# Allegro board PoFA1-10.brd
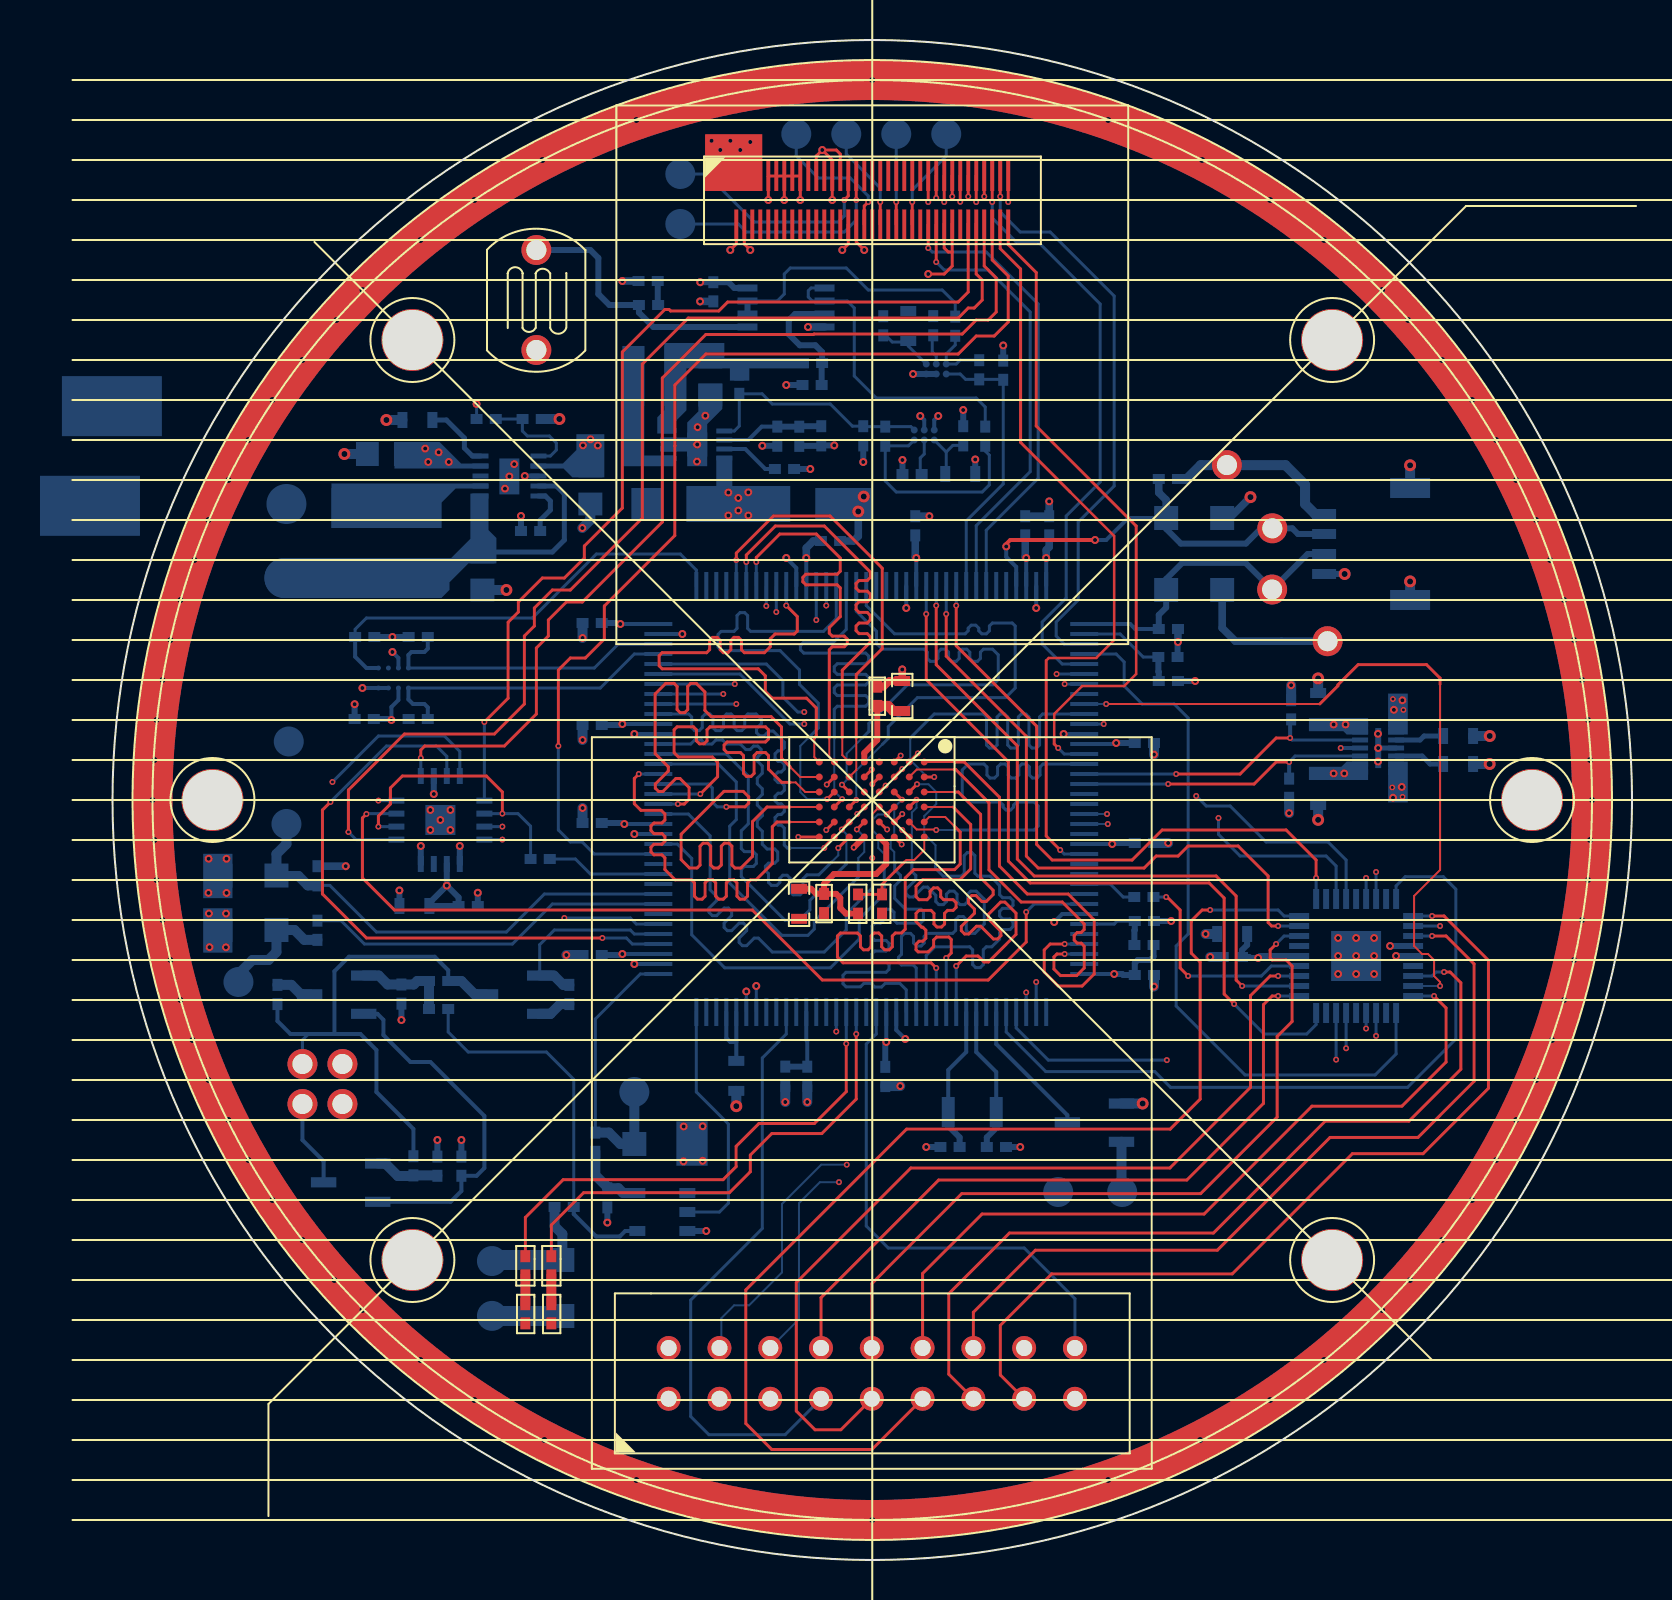
[diagram p0: board, top side]
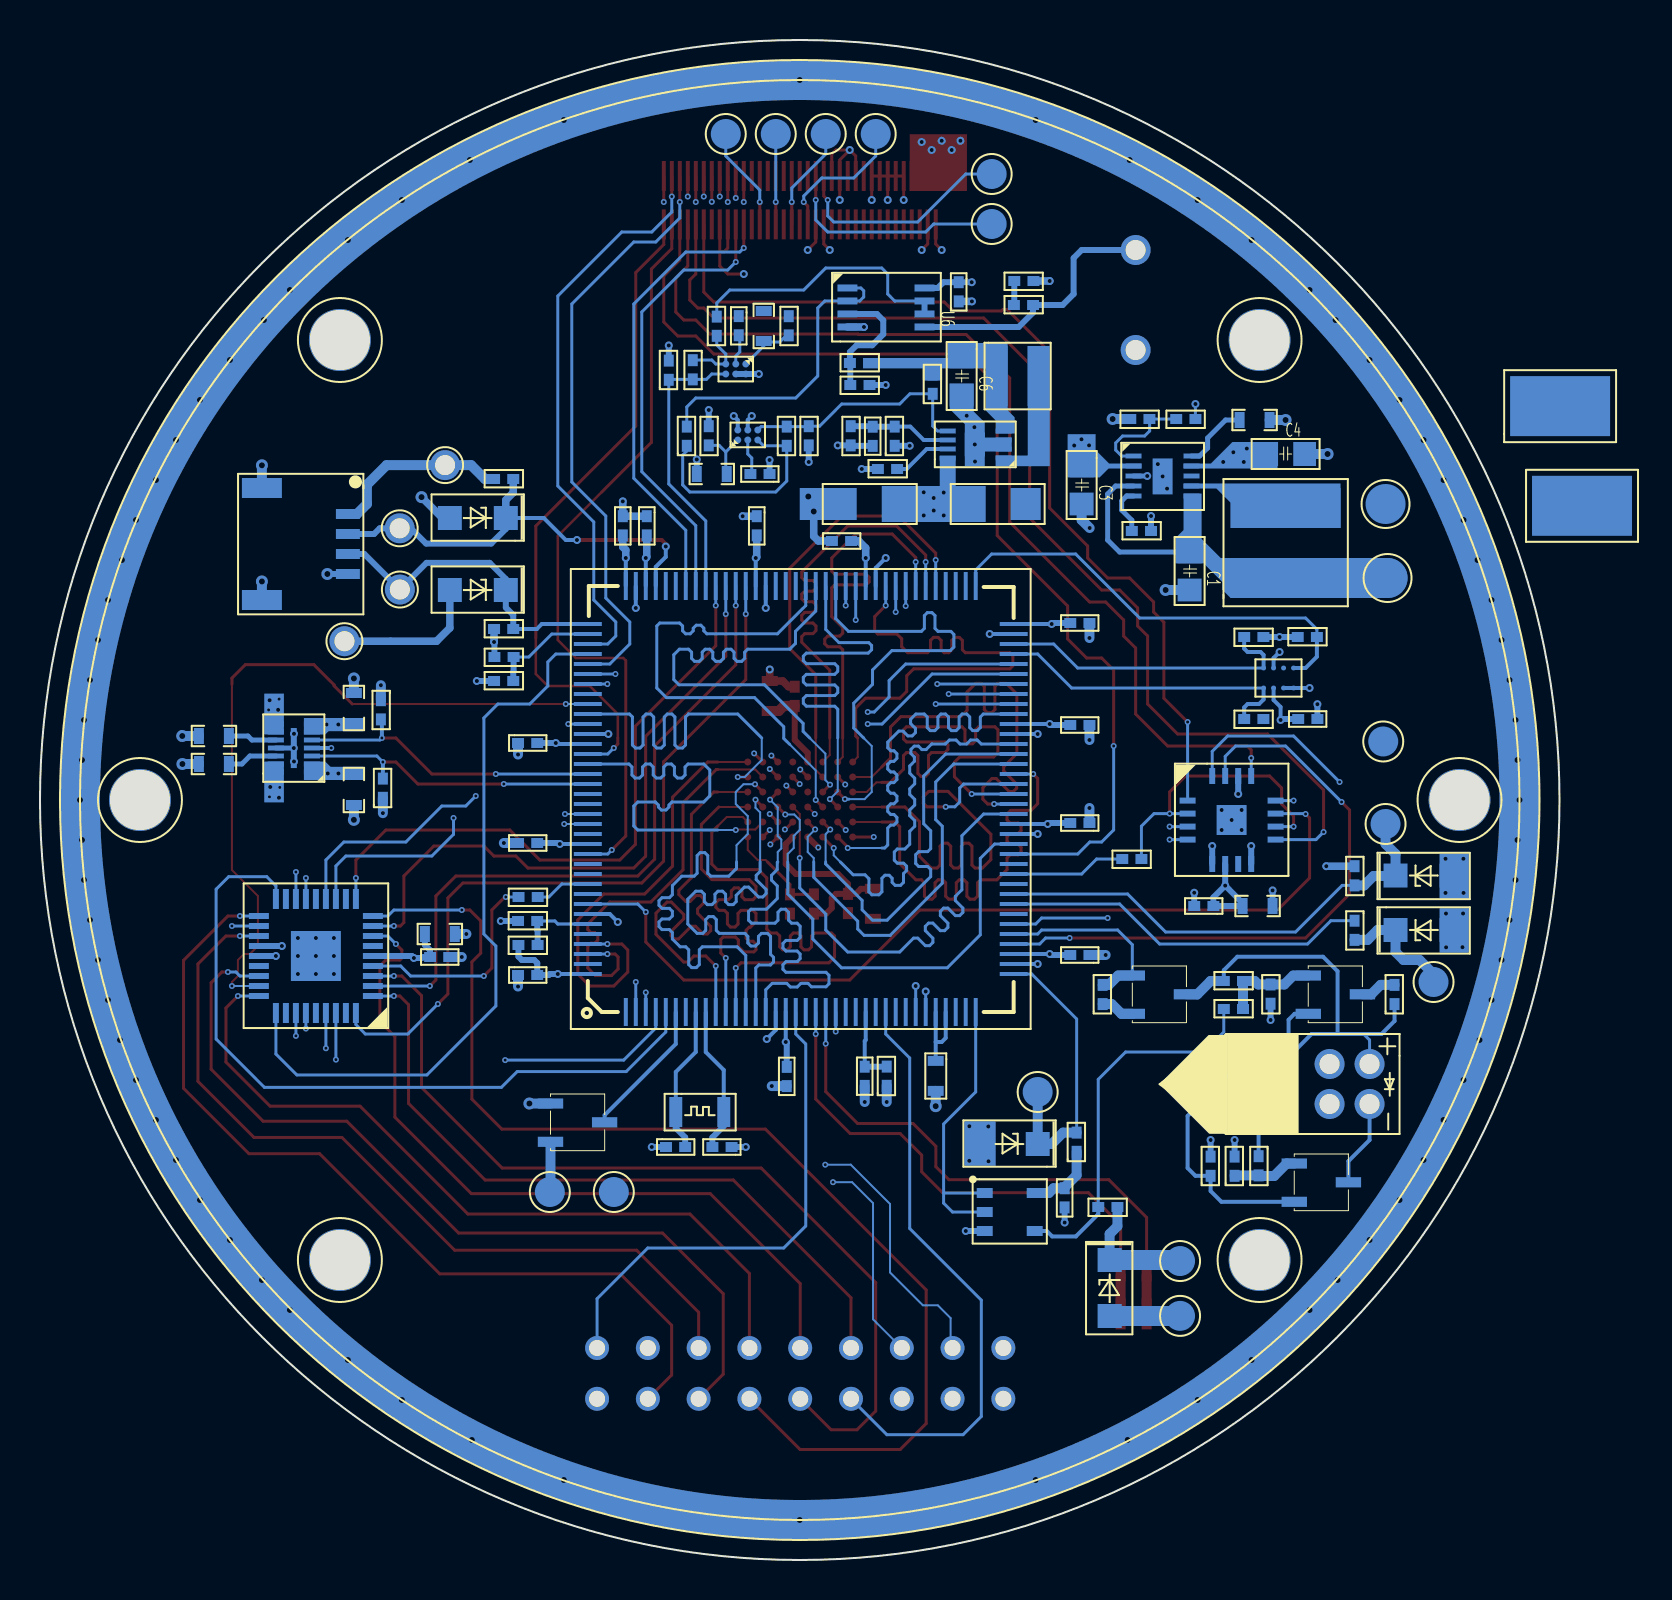
[diagram p1: board, bottom side, seen from below]

Outline 76 x 76 mm; copper layers: TOP, GND, VCC, BOTTOM. Coordinates in mm from the lower left corner of the outline.
Outline path: circle c38,38 r38

## Design rules (mm)
constraint set DEFAULT: min track width 0.15
net group BUS_SWITCH: nets BUS_SWITCH N57182
net group N00115: nets N00115 N00127
net group SYNC_SWITCH: nets N94378 SYNC_SWITCH
net group UART3_TX: nets N169854 UART3_TX
net group VPHOTO: nets N83192 VPHOTO
net group CAM1_SIGNAL: nets CAM1_D0 CAM1_D1 CAM1_D2 CAM1_D3 CAM1_D4 CAM1_D5 CAM1_D6 CAM1_D7 CAM1_HSYNC CAM1_PCLK CAM1_VSYNC
net group DAY_NIGHT: nets DAY_NIGHT N16602 N16606
net group DCMI: nets DCMI_D0 DCMI_D1 DCMI_D2 DCMI_D3 DCMI_D4 DCMI_D5 DCMI_D6 DCMI_D7 DCMI_D8 DCMI_D9 DCMI_D10 DCMI_D11 DCMI_D12 DCMI_D13 DCMI_HSYNC DCMI_PIXCLK DCMI_VSYNC
net group LDO22: nets LDO22 N00530 N02509 N04876 N06131 N06552 N13003 UNDER_VOLTAGE VCAP
net group MG1_DATA_BUS: nets FMC_D0 FMC_D1 FMC_D2 FMC_D3 FMC_D4 FMC_D5 FMC_D6 FMC_D7 FMC_D8 FMC_D9 FMC_D10 FMC_D11 FMC_D12 FMC_D13 FMC_D14 FMC_D15 FMC_NBL0 FMC_NBL1 FMC_NE1 FMC_NOE FMC_NWE
net group MG2_ADDR_BUS: nets FMC_A0 FMC_A1 FMC_A2 FMC_A3 FMC_A4 FMC_A5 FMC_A6 FMC_A7 FMC_A8 FMC_A9 FMC_A10 FMC_A11 FMC_A12 FMC_A13 FMC_A14 FMC_A15 FMC_A16 FMC_A17 FMC_A18 FMC_A19 FMC_A20
net group N112361: nets N66919 N67019 N67360 N69262 N70908 N112361

## Placement (name value [footprint] x y rotation side)
C1  10uF  [C0805]  19.1 50.5 270 bottom
C2  1uF  [C0603]  16.05 56.6 180 bottom
C3  10uF  [C0805]  24.5 54.8 270 bottom
C4  10uF  [C0805]  14.75 54.7 180 bottom
C6  10uF  [C0805]  30.5 60.25 270 bottom
C7  33pF  [C0402]  34.1 55.7 90 bottom
C8  22uF  [C1206]  29.7 52 180 bottom
C9  22uF  [C1206]  32.9 53.6 0 bottom
C10  0.1uF  [C0402]  30.3 63.9 270 bottom
C11  2.2uF  [C0603]  43.2 53.9 180 bottom
C12  0.1uF  [C0402]  39.5 54.55 0 bottom
C13  1uF  [C0603]  60.7 43.4 270 bottom
C14  1uF  [C0603]  59.9 37.7 90 bottom
C15  1uF  [C0603]  66.5 40.2 0 bottom
C16  1uF  [C0603]  66.5 41.6 0 bottom
C17  2.2uF  [C0603]  40.2 62.5 270 bottom
C18  0.1uF  [C0402]  41.3 62.2 270 bottom
C19  10uF  [C0603]  39.9 42.4 90 top
C20  0.1uF  [C0402]  38.5 42.7 90 top
C21  0.1uF  [C0402]  35.34 33.31 270 top
C22  10uF  [C0603]  33.94 33.61 270 top
C23  0.1uF  [C0402]  56.5 29.9 180 bottom
C24  10uF  [C0603]  56.8 30.9 180 bottom
C25  0.1uF  [C0402]  25 18.6 270 bottom
C26  0.1uF  [C0402]  17.3 32.95 0 bottom
C27  10uF  [C0603]  15.9 32.3 180 bottom
C28  0.1uF  [C0402]  38.4 23.69 90 bottom
C29  0.1uF  [C0402]  52.1 29 180 bottom
C30  0.1uF  [C0402]  52.1 35.6 180 bottom
C31  0.1uF  [C0402]  52.1 40.6 180 bottom
C32  0.1uF  [C0402]  23.5 30.5 0 bottom
C33  0.1uF  [C0402]  23.5 37.1 0 bottom
C34  0.1uF  [C0402]  23.5 42 0 bottom
C35  0.1uF  [C0402]  23.5 47.1 0 bottom
C36  0.1uF  [C0402]  36.4 50.7 180 bottom
C37  0.1uF  [C0402]  40.4 52.2 270 bottom
C38  0.1uF  [C0402]  47.1 52.2 270 bottom
C39  0.1uF  [C0402]  45.9 52.2 270 bottom
C40  0.1uF  [C0402]  34.5 23.7 90 bottom
C41  12pF  [C0402]  41.4 20.9 0 bottom
C42  12pF  [C0402]  44.7 20.4 180 bottom
C43  0.1uF  [C0402]  12.1 42.3 0 bottom
D1  LED  [LED0402]  21.7 15.2 270 top
D2  LED  [LED0402]  20.4 15.2 270 top
D3  PTVS3V3S1UTR  [SOD123W]  26.1 20.8 0 bottom
D4  PTVS3V3S1UTR  [SOD123W]  22.5 15 270 bottom
D5  PTVS3V3S1UTR  [SOD123W]  8.2 31.5 180 bottom
D6  PTVS3V3S1UTR  [SOD123W]  8.2 34.22 180 bottom
D7  PTVS3V3S1UTR  [SOD123W]  52.7 52.1 0 bottom
D8  PTVS3V3S1UTR  [SOD123W]  52.7 48.5 0 bottom
J1  Header2x9-2.54mm  [HEADER2X9-2D54]  27.82 10.6 0 top
J2  DF40HC(3.0)-70DS-0.4V(51)  [DF40HC-70DS]  31.2 69.2 0 top
J3  CONN_SH1.0mm_4P  [CONN_SH1D0MM_4P]  60.6 52.3 270 bottom
L1  10uH  [L47473]  13.7 49.1 90 bottom
L2  4.7uH  [L3015]  28.1 59.2 180 bottom
L3  1uH  [L0603]  31.6 25.01 270 bottom
LD1  LaserDiode  [AXIAL_2D0_4P]  9.5 24.8 270 bottom
NOREF  -  [unnamed]  15 15 0 top
NOREF#2  -  [unnamed]  61 15 0 top
NOREF#3  -  [unnamed]  61 61 0 top
NOREF#4  -  [unnamed]  5 38 0 top
NOREF#5  -  [unnamed]  71 38 0 top
NOREF#6  -  [unnamed]  15 61 0 top
Q1  2SC1815  [SOT23-3]  13 29.7 270 bottom
Q2  2SC1815  [SOT23-3]  13.7 20.3 270 bottom
Q3  FH3415A  [SOT23-3]  21.8 29.7 270 bottom
R1  200K  [R0402]  21.4 51.2 180 bottom
R2  2.26M  [R0402]  18.2 57.3 0 bottom
R3  1M  [R0402]  20.5 57.3 0 bottom
R4  10K  [R0402]  34.1 54.3 180 bottom
R5  562K  [R0402]  33 55.7 90 bottom
R6  1M  [R0402]  35.7 56.7 270 bottom
R8  1M  [R0402]  35.5 59.6 180 bottom
R9  1M  [R0402]  34.5 59 0 bottom
R10  36K  [R0402]  43.4 55.7 90 bottom
R11  10K  [R0402]  37.8 56.7 270 bottom
R12  147K  [R0402]  38.4 55.7 90 bottom
R13  3.3K  [R0402]  42.8 56.7 270 bottom
R14  100K  [R0402]  58.6 38.1 90 bottom
R15  100K  [R0402]  59.2 43 270 bottom
R17  GL7549  [AXIAL-5D0]  21.2 60.5 90 top
R19  3.3K  [R0402]  38.8 62.2 270 bottom
R20  10K  [R0402]  44.3 59 90 bottom
R21  36K  [R0402]  41.9 61.2 90 bottom
R22  147K  [R0402]  43.6 60 270 bottom
R23  10K  [R0402]  31.1 58.3 90 bottom
R24  1K  [R0402]  51.09 33.4 0 bottom
R25  510  [R0402]  16.8 28.7 180 bottom
R26  510  [R0402]  14.7 28.79 270 bottom
R27  40  [R0402]  17.2 19.2 90 bottom
R28  510  [R0402]  16 19.2 90 bottom
R29  510  [R0402]  15.3 20.2 270 bottom
R30  40  [R0402]  8 27.79 90 bottom
R31  510  [R0402]  16.8 27.3 180 bottom
R32  68K  [R0402]  26.3 64.2 0 bottom
R33  0  [R0402]  27.3 62.5 180 bottom
R34  0  [R0402]  37.54 32.31 90 top
R35  DNP  [R0402]  38.74 32.31 90 top
R36  2K  [R0402]  21.7 12.8 270 top
R37  2K  [R0402]  20.4 12.8 270 top
R38  10K  [R0402]  23.9 20.4 90 bottom
R39  10K  [R0402]  22.1 17.9 0 bottom
R40  10K  [R0402]  33.4 23.7 90 bottom
R41  10K  [R0402]  14.8 42.3 0 bottom
R42  10K  [R0402]  14.8 46.4 0 bottom
R43  10K  [R0402]  13.11 45.9 180 bottom
R44  10K  [R0402]  10.5 31.98 270 bottom
R45  10K  [R0402]  10.5 34.7 270 bottom
R46  10K  [R0402]  53.3 46.3 180 bottom
R47  10K  [R0402]  53.3 53.8 180 bottom
R48  10K  [R0402]  22.6 27.79 90 bottom
R49  1K  [R0402]  20.9 35.3 0 bottom
R50  10K  [R0402]  52.3 45.4 0 bottom
R51  10K  [R0402]  51.1 31 0 bottom
R52  DNP  [R0402]  53.3 43.7 180 bottom
R53  DNP  [R0402]  52.1 31.7 180 bottom
TP1  Solar Cell V+  [TP_SMD_OD2D0]  8.6 49.1 180 bottom
TP2  Solar Cell V-  [TP_SMD_OD2D0]  8.7 52.8 180 bottom
TP5  SMD TP  [TP_SMD_OD1D5]  26.1 23.4 180 bottom
TP6  SMD TP  [TP_SMD_OD1D5]  18.98 14.95 180 bottom
TP7  SMD TP  [TP_SMD_OD1D5]  18.98 12.21 180 bottom
TP8  SMD TP  [TP_THR_ID1D0]  55.74 54.75 180 bottom
TP9  SMD TP  [TP_THR_ID1D0]  58 48.52 180 bottom
TP10  SMD TP  [TP_THR_ID1D0]  58.01 51.59 180 bottom
TP11  SMD TP  [TP_THR_ID1D0]  60.77 45.94 180 bottom
TP12  SMD TP  [TP_SMD_OD1D5]  50.5 18.4 180 bottom
TP13  SMD TP  [TP_SMD_OD1D5]  47.3 18.4 180 bottom
TP14  SMD TP  [TP_SMD_OD1D5]  6.3 28.9 180 bottom
TP15  SMD TP  [TP_SMD_OD1D5]  8.7 36.8 180 bottom
TP16  SMD TP  [TP_SMD_OD1D5]  8.82 40.93 180 bottom
TP17  SMD TP  [TP_SMD_OD1D5]  28.4 66.8 180 bottom
TP18  SMD TP  [TP_SMD_OD1D5]  28.4 69.3 180 bottom
TP19  SMD TP  [TP_SMD_OD1D5]  34.2 71.3 180 bottom
TP20  SMD TP  [TP_SMD_OD1D5]  36.7 71.3 180 bottom
TP21  SMD TP  [TP_SMD_OD1D5]  39.2 71.3 180 bottom
TP22  SMD TP  [TP_SMD_OD1D5]  41.7 71.3 180 bottom
TP23  SOLDER POINT  [TP_SMD_3D0X5D0]  -0.03 57.69 90 bottom
TP24  SOLDER POINT  [TP_SMD_3D0X5D0]  -1.13 52.71 270 bottom
U1  LTC3105EDD#PBF  [DFN-10]  18.41 55.2 270 bottom
U2  LTC3539EDCB#PBF  [DFN-8]  30.6 55.1 90 bottom
U4  ADCMP380-1ACBZ-RL7  [WLCSP-6]  41.1 56 90 bottom
U5  TPS22976ADPUR  [WSON-14]  64.2 39.4 90 bottom
U6  ADA4051-2ARMZ  [RM-8]  32 63.6 270 bottom
U7  ADCMP380-1ACBZ-RL7  [WLCSP-6]  40.7 59.8 270 bottom
U8  IS66WVE2M16EBLL-70BLI-TR  [TFBGA-48]  40.6 39.9 270 top
U9  STM32L496ZGT6  [LQFP-144]  47.9 28.1 180 bottom
U10  MAX4761ETX+T  [TQFN-36]  62.2 30.2 0 bottom
U11  SN74LVC1G08QDBVRQ1  [SOT-23-5]  29 15.9 180 bottom
U13  BAT754C  [SOT23-3]  50.9 23.3 270 bottom
U14  HDC1010YPAR  [DSBGA-8]  14.8 43.6 90 bottom
U15  MAX4754AEBE+T  [QFN-16]  16.4 37 180 bottom
Y1  32.768KHz  [CRYSTAL_3215]  44.2 22.4 180 bottom

## Library data of the parts
C1 C3 C4 C6 C19 C22 C24 C27 = CAP NP: signal model: DEFAULT_CAPACITOR_1e+07pF_2_1
C2 C13-C16 = CAP NP: signal model: DEFAULT_CAPACITOR_1e+06pF_2_1
C7 = CAP NP: signal model: DEFAULT_CAPACITOR_33.000000pF_2_1
C8 C9 = CAP NP: signal model: DEFAULT_CAPACITOR_2.2e+07pF_2_1
C10 C12 C18 C20 C21 C23 C25 C26 C28-C40 C43 = CAP NP: signal model: DEFAULT_CAPACITOR_100000pF_2_1
C11 C17 = CAP NP: signal model: DEFAULT_CAPACITOR_2.2e+06pF_2_1
C41 C42 = CAP NP: signal model: DEFAULT_CAPACITOR_12.000000pF_2_1
D1 D2 = LED
D3-D8 = DIODE TVS
J1 = Header2x9
J2 = Header2x35
J3 = CONN_SH1.0mm_4P
L1 = INDUCTOR: signal model: DEFAULT_INDUCTOR_10000nH_2_1
L2 = INDUCTOR: signal model: DEFAULT_INDUCTOR_4700nH_2_1
L3 = INDUCTOR: signal model: DEFAULT_INDUCTOR_1000nH_2_1
LD1 = LaserDiode
Q1 Q2 = 2SC1815
Q3 = FH3415A
R1 = R: signal model: DEFAULT_RESISTOR_200000OHM_2_1
R2 = R: signal model: DEFAULT_RESISTOR_0.00226OHM_2_1
R3 R6 R8 R9 R34 = R: signal model: DEFAULT_RESISTOR_0.001OHM_2_1
R4 R11 R20 R23 R38-R48 R50 R51 = R: signal model: DEFAULT_RESISTOR_10000OHM_2_1
R5 = R: signal model: DEFAULT_RESISTOR_562000OHM_2_1
R10 R21 = R: signal model: DEFAULT_RESISTOR_36000OHM_2_1
R12 R22 = R: signal model: DEFAULT_RESISTOR_147000OHM_2_1
R13 R19 = R: signal model: DEFAULT_RESISTOR_3300OHM_2_1
R14 R15 = R: signal model: DEFAULT_RESISTOR_100000OHM_2_1
R17 = RESISTOR VAR 2
R24 R49 = R: signal model: DEFAULT_RESISTOR_1000.000000OHM_2_1
R25 R26 R28 R29 R31 = R: signal model: DEFAULT_RESISTOR_510.000000OHM_2_1
R27 R30 = R: signal model: DEFAULT_RESISTOR_40.000000OHM_2_1
R32 = R: signal model: DEFAULT_RESISTOR_68000OHM_2_1
R33 = R: signal model: R_R0402_0_0
R35 R52 R53 = R
R36 R37 = R: signal model: DEFAULT_RESISTOR_2000OHM_2_1
TP1 TP2 = T POINT A
TP5-TP22 = T POINT R
TP23 TP24 = T POINT S
U1 = LTC3105EDD#PBF
U2 = LTC3539EDCB#PBF
U4 U7 = ADCMP380-1ACBZ-RL7
U5 = TPS22976ADPUR
U6 = ADA4051-2ARMZ
U8 = IS66WVE2M16EBLL-70BLI-TR
U9 = STM32L496ZGT6
U10 = MAX4761EBX+T
U11 = SN74LVC1G08QDBVRQ1
U13 = BAT754C
U14 = HDC1010YPAR
U15 = MAX4754AEBE+T
Y1 = CRYSTAL

## Footprints (pads in the part's own frame, mm; a bottom-side part is the same pattern mirrored in y, then rotated)
AXIAL-5D0
  round 1.5 hole 1: 1(0,0) 2(5,0)
AXIAL_2D0_4P
  round 1.5 hole 1: 1(0,0) 2(2,0) 3(0,-2) 4(2,-2)
C0402
  rect 0.6x0.5 smd: 1(0.01,0.25) 2(0.97,0.25)
C0603
  rect 0.5x0.8 smd: 1(0.05,0.4) 2(1.55,0.4)
C0805
  rect 1.14x1.2 smd: 1(0.1,0.6) 2(2,0.6)
C1206
  rect 1.5x1.6 smd: 1(0.2,0.8) 2(3,0.8)
CONN_SH1D0MM_4P
  rect 0.5x1.2 smd: 1(0,0) 2(1,0) 3(2,0) 4(3,0)
  rect 1x2 smd: 5(-1.3,-4.3) 6(4.3,-4.3)
CRYSTAL_3215
  rect 0.65x1.5 smd: 1(0,0) 2(2.4,0)
DF40HC-70DS
  rect 0.2x1.5 smd: 1(0,0) 2(0.4,0) 3(0.8,0) 4(1.2,0) 5(1.6,0) 6(2,0) 7(2.4,0) 8(2.8,0) 9(3.2,0) 10(3.6,0) 11(4,0) 12(4.4,0) 13(4.8,0) 14(5.2,0) 15(5.6,0) 16(6,0) 17(6.4,0) 18(6.8,0) 19(7.2,0) 20(7.6,0) 21(8,0) 22(8.4,0) 23(8.8,0) 24(9.2,0) 25(9.6,0) 26(10,0) 27(10.4,0) 28(10.8,0) 29(11.2,0) 30(11.6,0) 31(12,0) 32(12.4,0) 33(12.8,0) 34(13.2,0) 35(13.6,0) 36(13.6,-2.42) 37(13.2,-2.42) 38(12.8,-2.42) 39(12.4,-2.42) 40(12,-2.42) 41(11.6,-2.42) 42(11.2,-2.42) 43(10.8,-2.42) 44(10.4,-2.42) 45(10,-2.42) 46(9.6,-2.42) 47(9.2,-2.42) 48(8.8,-2.42) 49(8.4,-2.42) 50(8,-2.42) 51(7.6,-2.42) 52(7.2,-2.42) 53(6.8,-2.42) 54(6.4,-2.42) 55(6,-2.42) 56(5.6,-2.42) 57(5.2,-2.42) 58(4.8,-2.42) 59(4.4,-2.42) 60(4,-2.42) 61(3.6,-2.42) 62(3.2,-2.42) 63(2.8,-2.42) 64(2.4,-2.42) 65(2,-2.42) 66(1.6,-2.42) 67(1.2,-2.42) 68(0.8,-2.42) 69(0.4,-2.42) 70(0,-2.42)
DFN-8
  rect 0.25x0.8 smd: 1(0,-2.8) 2(0.45,-2.8) 3(0.9,-2.8) 4(1.35,-2.8) 5(1.35,0) 6(0.9,0) 7(0.45,0) 8(0,0)
  rect 1.2x1 smd: 9(0.676,-1.355)
DFN-10
  rect 0.25x0.8 smd: 1(0,-2.9) 2(0.5,-2.9) 3(1,-2.9) 4(1.5,-2.9) 5(2,-2.9) 6(2,0) 7(1.5,0) 8(1,0) 9(0.5,0) 10(0,0)
  rect 1.8x1 smd: 11(1.022,-1.444)
DSBGA-8
  round 0.25 smd: A1(0,0) A2(1,0) B1(0,-0.5) B2(1,-0.5) C1(0,-1) C2(1,-1) D1(0,-1.5) D2(1,-1.5)
HEADER2X9-2D54
  round 1.2 hole 0.8: 1(0,-2.54) 2(2.54,-2.54) 3(5.08,-2.54) 4(7.62,-2.54) 5(10.16,-2.54) 6(12.7,-2.54) 7(15.24,-2.54) 8(17.78,-2.54) 9(20.32,-2.54) 10(20.32,0) 11(17.78,0) 12(15.24,0) 13(12.7,0) 14(10.16,0) 15(7.62,0) 16(5.08,0) 17(2.54,0) 18(0,0)
L0603
  rect 0.5x0.8 smd: 1(0.05,0.4) 2(1.55,0.4)
L3015
  rect 1x3 smd: 1(0,0) 2(2,0)
L47473
  rect 2x5.5 smd: 1(0,0) 2(3.5,0)
LED0402
  rect 0.6x0.5 smd: 1(0.01,0.25) 2(0.97,0.25)
LQFP-144
  rect 0.2x1.4 smd: 1(1.2,-0.7) 2(1.7,-0.7) 3(2.2,-0.7) 4(2.7,-0.7) 5(3.2,-0.7) 6(3.7,-0.7) 7(4.2,-0.7) 8(4.7,-0.7) 9(5.2,-0.7) 10(5.7,-0.7) 11(6.2,-0.7) 12(6.7,-0.7) 13(7.2,-0.7) 14(7.7,-0.7) 15(8.2,-0.7) 16(8.7,-0.7) 17(9.2,-0.7) 18(9.7,-0.7) 19(10.2,-0.7) 20(10.7,-0.7) 21(11.2,-0.7) 22(11.7,-0.7) 23(12.2,-0.7) 24(12.7,-0.7) 25(13.2,-0.7) 26(13.7,-0.7) 27(14.2,-0.7) 28(14.7,-0.7) 29(15.2,-0.7) 30(15.7,-0.7) 31(16.2,-0.7) 32(16.7,-0.7) 33(17.2,-0.7) 34(17.7,-0.7) 35(18.2,-0.7) 36(18.7,-0.7) 73(18.7,20.6) 74(18.2,20.6) 75(17.7,20.6) 76(17.2,20.6) 77(16.7,20.6) 78(16.2,20.6) 79(15.7,20.6) 80(15.2,20.6) 81(14.7,20.6) 82(14.2,20.6) 83(13.7,20.6) 84(13.2,20.6) 85(12.7,20.6) 86(12.2,20.6) 87(11.7,20.6) 88(11.2,20.6) 89(10.7,20.6) 90(10.2,20.6) 91(9.7,20.6) 92(9.2,20.6) 93(8.7,20.6) 94(8.2,20.6) 95(7.7,20.6) 96(7.2,20.6) 97(6.7,20.6) 98(6.2,20.6) 99(5.7,20.6) 100(5.2,20.6) 101(4.7,20.6) 102(4.2,20.6) 103(3.7,20.6) 104(3.2,20.6) 105(2.7,20.6) 106(2.2,20.6) 107(1.7,20.6) 108(1.2,20.6)
  rect 1.4x0.2 smd: 37(20.6,1.2) 38(20.6,1.7) 39(20.6,2.2) 40(20.6,2.7) 41(20.6,3.2) 42(20.6,3.7) 43(20.6,4.2) 44(20.6,4.7) 45(20.6,5.2) 46(20.6,5.7) 47(20.6,6.2) 48(20.6,6.7) 49(20.6,7.2) 50(20.6,7.7) 51(20.6,8.2) 52(20.6,8.7) 53(20.6,9.2) 54(20.6,9.7) 55(20.6,10.2) 56(20.6,10.7) 57(20.6,11.2) 58(20.6,11.7) 59(20.6,12.2) 60(20.6,12.7) 61(20.6,13.2) 62(20.6,13.7) 63(20.6,14.2) 64(20.6,14.7) 65(20.6,15.2) 66(20.6,15.7) 67(20.6,16.2) 68(20.6,16.7) 69(20.6,17.2) 70(20.6,17.7) 71(20.6,18.2) 72(20.6,18.7) 109(-0.7,18.7) 110(-0.7,18.2) 111(-0.7,17.7) 112(-0.7,17.2) 113(-0.7,16.7) 114(-0.7,16.2) 115(-0.7,15.7) 116(-0.7,15.2) 117(-0.7,14.7) 118(-0.7,14.2) 119(-0.7,13.7) 120(-0.7,13.2) 121(-0.7,12.7) 122(-0.7,12.2) 123(-0.7,11.7) 124(-0.7,11.2) 125(-0.7,10.7) 126(-0.7,10.2) 127(-0.7,9.7) 128(-0.7,9.2) 129(-0.7,8.7) 130(-0.7,8.2) 131(-0.7,7.7) 132(-0.7,7.2) 133(-0.7,6.7) 134(-0.7,6.2) 135(-0.7,5.7) 136(-0.7,5.2) 137(-0.7,4.7) 138(-0.7,4.2) 139(-0.7,3.7) 140(-0.7,3.2) 141(-0.7,2.7) 142(-0.7,2.2) 143(-0.7,1.7) 144(-0.7,1.2)
QFN-16
  rect 0.8x0.3 smd: 1(-2.2,0.97) 2(-2.2,0.32) 3(-2.2,-0.33) 4(-2.2,-0.98) 9(2.2,-0.98) 10(2.2,-0.33) 11(2.2,0.32) 12(2.2,0.97)
  rect 0.3x0.8 smd: 5(-0.97,-2.2) 6(-0.32,-2.2) 7(0.33,-2.2) 8(0.98,-2.2) 13(0.98,2.2) 14(0.33,2.2) 15(-0.32,2.2) 16(-0.97,2.2)
  rect 1.5x1.5 smd: EPAD(0,0)
R0402
  rect 0.6x0.5 smd: 1(0.01,0.25) 2(0.97,0.25)
RM-8
  rect 0.35x1 smd: 1(-0.001,-3.615) 2(0.649,-3.615) 3(1.299,-3.615) 4(1.949,-3.615) 5(1.949,0.241) 6(1.299,0.241) 7(0.649,0.241) 8(-0.001,0.241)
SOD123W
  rect 1.2x1.2 smd: 1(0,0) 2(2.8,0)
SOT23-3
  rect 0.51x1.27 smd: 1(0.476,0.434) 2(2.391,0.434) 3(1.415,3.142)
SOT-23-5
  rect 0.8x0.5 smd: 1(0.25,2.45) 2(0.25,1.5) 3(0.25,0.55) 4(2.75,0.55) 5(2.75,2.45)
TFBGA-48
  round 0.35 smd: A1(0,0) A2(0.75,0) A3(1.5,0) A4(2.25,0) A5(3,0) A6(3.75,0) B1(0,-0.75) B2(0.75,-0.75) B3(1.5,-0.75) B4(2.25,-0.75) B5(3,-0.75) B6(3.75,-0.75) C1(0,-1.5) C2(0.75,-1.5) C3(1.5,-1.5) C4(2.25,-1.5) C5(3,-1.5) C6(3.75,-1.5) D1(0,-2.25) D2(0.75,-2.25) D3(1.5,-2.25) D4(2.25,-2.25) D5(3,-2.25) D6(3.75,-2.25) E1(0,-3) E2(0.75,-3) E3(1.5,-3) E4(2.25,-3) E5(3,-3) E6(3.75,-3) F1(0,-3.75) F2(0.75,-3.75) F3(1.5,-3.75) F4(2.25,-3.75) F5(3,-3.75) F6(3.75,-3.75) G1(0,-4.5) G2(0.75,-4.5) G3(1.5,-4.5) G4(2.25,-4.5) G5(3,-4.5) G6(3.75,-4.5) H1(0,-5.25) H2(0.75,-5.25) H3(1.5,-5.25) H4(2.25,-5.25) H5(3,-5.25) H6(3.75,-5.25)
TP_SMD_3D0X5D0
  rect 3x5 smd: 1(0,0)
TP_SMD_OD1D5
  round 1.5 smd: 1(0,0)
TP_SMD_OD2D0
  round 2 smd: 1(0,0)
TP_THR_ID1D0
  round 1.5 hole 1: 1(0,0)
TQFN-36
  rect 1x0.3 smd: 1(-2.85,2) 2(-2.85,1.5) 3(-2.85,1) 4(-2.85,0.5) 5(-2.85,0) 6(-2.85,-0.5) 7(-2.85,-1) 8(-2.85,-1.5) 9(-2.85,-2) 19(2.85,-2) 20(2.85,-1.5) 21(2.85,-1) 22(2.85,-0.5) 23(2.85,0) 24(2.85,0.5) 25(2.85,1) 26(2.85,1.5) 27(2.85,2)
  rect 0.3x1 smd: 10(-2,-2.85) 11(-1.5,-2.85) 12(-1,-2.85) 13(-0.5,-2.85) 14(0,-2.85) 15(0.5,-2.85) 16(1,-2.85) 17(1.5,-2.85) 18(2,-2.85) 28(2,2.85) 29(1.5,2.85) 30(1,2.85) 31(0.5,2.85) 32(0,2.85) 33(-0.5,2.85) 34(-1,2.85) 35(-1.5,2.85) 36(-2,2.85)
  rect 2.5x2.5 smd: EPAD(0,0)
unnamed
  round 3.1 hole 3 unplated: (0,0)
WLCSP-6
  round 0.35 smd: A1(0,0) A2(0.5,0) B1(0,-0.5) B2(0.5,-0.5) C1(0,-1) C2(0.5,-1)
WSON-14
  rect 0.25x0.8 smd: 1(0,-1.8) 2(0.4,-1.8) 3(0.8,-1.8) 4(1.2,-1.8) 5(1.6,-1.8) 6(2,-1.8) 7(2.4,-1.8) 8(2.4,0) 9(2,0) 10(1.6,0) 11(1.2,0) 12(0.8,0) 13(0.4,0) 14(0,0)
  rect 2x0.3 smd: EPAD(1.197,-0.895)

## Nets
GND: C1.2 C2.2 C3.2 C4.2 C6.2 C8.2 C9.2 C10.2 C11.1 C12.1 C13.1 C14.1 C15.2 C16.2 C17.1 C18.1 C19.2 C20.2 C21.2 C22.2 C23.2 C24.2 C25.2 C26.2 C27.2 C28.1 C29.1 C30.1 C31.1 C32.1 C33.1 C34.1 C35.1 C36.1 C37.1 C38.1 C39.1 C40.1 C41.1 C42.1 C43.1 D3.2 D4.2 D5.2 D6.2 D7.2 D8.2 J1.18 J2.5 J2.6 J2.7 J2.8 J2.9 J2.11 J2.13 J2.14 J2.43 J2.44 J2.55 J2.56 J2.69 J2.70 J3.4 J3.5 J3.6 R1.2 R3.2 R4.1 R5.1 R9.1 R14.1 R15.1 R26.2 R27.2 R28.2 R32.1 R35.1 R52.1 R53.1 TP2.1(TP) TP7.1(TP) TP11.1(TP) TP13.1(TP) TP16.1(TP) TP24.1(TP) U1.3 U1.11 U2.2 U2.3 U2.9 U4.A2 U4.B2 U5.11 U5.EPAD U6.4(V-) U7.A2 U7.B2 U8.D1 U8.E6 U9.16 U9.30(VSSA) U9.31 U9.38 U9.51 U9.61 U9.83 U9.94 U9.107 U9.120 U9.130 U9.138 U9.143 U10.22 U10.23 U10.EPAD U11.3 U14.B2 U14.C1 U14.D1 U15.5 U15.8 U15.14 U15.EPAD
VDD33: C7.1 C8.1 C9.1 C13.2 C14.2 C19.1 C20.1 C21.1 C22.1 C23.1 C24.1 C25.1 C26.1 C27.1 C28.2 C29.2 C30.2 C31.2 C32.2 C33.2 C34.2 C35.2 C36.2 C37.2 C38.2 C39.2 C43.2 J3.1 L3.2 Q3.2(S) R6.2 R17.1 R19.1 R20.2 R34.1 R36.2 R37.2 R38.1 R40.1 R41.1 R42.1 R43.1 R45.1 R46.1 R47.1 R48.1 R50.2 R51.2 TP8.1(TP) U2.8(VOUT) U5.1 U5.2 U5.4 U5.6 U5.7 U8.D6 U8.E1 U9.17 U9.39 U9.52 U9.62 U9.72 U9.84 U9.95 U9.106 U9.108 U9.121 U9.131 U9.144 U10.5(V+) U11.5 U13.1 U14.B1(VDD) U15.6(V+)
VDD_CAM1: J1.1 U5.13 U5.14
VDD_CAM2: J2.1 J2.2 J2.3 J2.4 U5.8 U5.9(VOUT2#9)
VSS: U9.71
BUS_SWITCH: R24.1 U9.135
CAM1_D0: J1.15 U10.1
CAM1_D1: J1.5 U10.3
CAM1_D2: J1.14 U10.7
CAM1_D3: J1.6 U10.9
CAM1_D4: J1.13 U10.27
CAM1_D5: J1.7 U10.25
CAM1_D6: J1.12 U10.21
CAM1_D7: J1.8 U10.19
CAM1_HSYNC: J1.3 U15.16
CAM1_PCLK: J1.11 U15.4
CAM1_PWDN: J1.10 U9.18
CAM1_PWR_EN: R14.2 U5.3 U9.125
CAM1_RST: J1.4 U9.27
CAM1_VSYNC: J1.2(VSYNC) U15.12
CAM2_D0: J2.26 U10.33
CAM2_D1: J2.25 U10.34
CAM2_D2: J2.28 U10.12
CAM2_D3: J2.27 U10.13
CAM2_D4: J2.30 U10.31
CAM2_D5: J2.29 U10.30
CAM2_D6: J2.32 U10.16
CAM2_D7: J2.31 U10.15
CAM2_HSYNC: J2.39 U15.13
CAM2_KEY1: J2.48 TP22.1(TP)
CAM2_KEY2: J2.50 TP21.1(TP)
CAM2_KEY3: J2.52 TP20.1(TP)
CAM2_KEY4: J2.54 TP19.1(TP)
CAM2_PCLK: J2.41 U15.1
CAM2_PWR_EN: R15.2 U5.5 U9.124
CAM2_RS232_RX: J2.15 TP18.1(TP)
CAM2_RS232_TX: J2.16 TP17.1(TP)
CAM2_VSYNC: J2.40 U15.9
DAY_NIGHT: R20.1 R22.2 U7.C2 U9.100
DCMI_D0: U9.96 U10.36
DCMI_D1: U9.97 U10.2
DCMI_D2: U9.98 U10.8
DCMI_D3: U9.99 U10.10
DCMI_D4: U9.112 U10.28
DCMI_D5: U9.117 U10.26
DCMI_D6: U9.4 U10.20
DCMI_D7: U9.5 U10.18
DCMI_D8: J2.34 U9.111
DCMI_D9: J2.33 U9.113
DCMI_D10: J2.36 U9.122
DCMI_D11: J2.35 U9.22
DCMI_D12: J2.38 U9.49
DCMI_D13: J2.37 U9.132
DCMI_HSYNC: U9.40 U15.15
DCMI_PIXCLK: U9.42 U15.3
DCMI_VSYNC: U9.137 U15.11
FMC_A0: U8.A3 U9.10
FMC_A1: U8.A4 U9.11
FMC_A2: U8.A5 U9.12
FMC_A3: U8.B3 U9.13
FMC_A4: U8.B4 U9.14
FMC_A5: U8.C3 U9.15
FMC_A6: U8.C4 U9.50
FMC_A7: U8.D4 U9.53
FMC_A8: U8.H2 U9.54
FMC_A9: U8.H3 U9.55
FMC_A10: U8.H4 U9.56
FMC_A11: U8.H5 U9.57
FMC_A12: U8.G3 U9.87
FMC_A13: U8.G4 U9.88
FMC_A14: U8.F3 U9.89
FMC_A15: U8.F4 U9.90
FMC_A16: U8.E4 U9.80
FMC_A17: U8.D3 U9.81
FMC_A18: U8.H1 U9.82
FMC_A19: U8.G2 U9.2
FMC_A20: U8.H6 U9.3
FMC_D0: U8.B6 U9.85
FMC_D1: U8.C5 U9.86
FMC_D2: U8.C6 U9.114
FMC_D3: U8.D5 U9.115
FMC_D4: U8.E5 U9.58
FMC_D5: U8.F5 U9.59
FMC_D6: U8.F6 U9.60
FMC_D7: U8.G6 U9.63
FMC_D8: U8.B1 U9.64
FMC_D9: U8.C1 U9.65
FMC_D10: U8.C2 U9.66
FMC_D11: U8.D2 U9.67
FMC_D12: U8.E2 U9.68
FMC_D13: U8.F2 U9.77
FMC_D14: U8.F1 U9.78
FMC_D15: U8.G1 U9.79
FMC_NBL0: U8.A1 U9.141
FMC_NBL1: U8.B2 U9.142
FMC_NE1: U8.B5 U9.123
FMC_NOE: U8.A2 U9.118
FMC_NWE: U8.G5 U9.119
HT_DRDYN: R43.2 U9.73 U14.D2
I2C1_SCL: J1.17 U9.129
I2C1_SDA: J1.16 U9.128
I2C2_SCL: R41.2 U9.69 U14.A1
I2C2_SDA: R42.2 U9.70 U14.A2
I2C3_SCL: U9.43
LD_PWR_EN: Q3.1 R48.2 U9.41
LDO22: C3.1 C10.1 R11.2 R13.1 U1.2 U6.8
LED1: D1.1(CATHODE) U9.20
LED2: D2.1(CATHODE) U9.21
NC1: U10.6
NC2: U10.11
NC3: U10.14
NC4: U10.17
NC5: U10.24
NC6: U10.29
NC7: U10.32
NC8: U10.35
POR: C40.2 R40.2 U9.25
SWCLK: D8.1(CATHODE) J3.3 R46.2 TP9.1(TP) U9.109
SWDIO: D7.1(CATHODE) J3.2 R47.2 TP10.1(TP) U9.105
SYNC_SWITCH: R49.2 U9.47
UART1_RX: J2.46 U9.102
UART1_TX: J2.45 U9.101
UART2_RX: D3.1(CATHODE) R38.2 TP5.1(TP) U9.37
UART2_TX: U9.36 U11.1 U11.2
UART3_RX: D6.1(CATHODE) R45.2 TP15.1(TP) U9.45
UART3_TX: R44.1 U9.44
UNDER_VOLTAGE: R11.1 R12.2 R23.1 U2.5 U4.C2
VCAP: C4.1 C6.1 L2.1 R2.1 R8.2 R23.2 TP23.1(TP) U1.9(VOUT) U2.4
VER1: R50.1 R52.2 U9.110
VER2: R51.1 R53.2 U9.139
VPHOTO: R17.2 R33.2 U6.5
N00115: L1.2 U1.7
N00127: C1.1 L1.1 TP1.1(TP) U1.4 U1.6
N00232: C2.1 U1.10
N00271: R1.1 U1.5
N00530: R2.2 R3.1 U1.1
N01950: R4.2 U2.7
N02509: L2.2 U2.1
N02830: C7.2 R5.2 R6.1 U2.6
N04876: R8.1 R9.2 U6.3
N06131: R10.1 R12.1 U4.C1
N06552: C11.2 R13.2 U4.A1(VCC)
N07653: C12.2 U4.B1
N11093: C16.1 U5.10
N11226: C15.1 U5.12
N13003: R10.2 U6.1 U6.2
N16448: C17.2 R19.2 U7.A1(VCC)
N16560: C18.2 U7.B1
N16602: R21.2 U6.6 U6.7
N16606: R21.1 R22.1 U7.C1
N57182: R24.2 U10.4
N66919: Q1.1 R25.2 R26.1 R31.2
N67019: LD1.1 Q3.3 R25.1 R29.1 R30.1
N67056: Q1.2(E) Q2.2(E) R27.1
N67360: Q2.1 R28.1 R29.2
N69262: Q1.3 R30.2
N70908: R31.1 R39.2 U11.4(Y)
N83192: R32.2 R33.1
N91897: R34.2 R35.2 U8.A6(ZZ#)
N94378: R49.1 U15.2 U15.10
N107906: D1.2 R36.1
N107910: D2.2 R37.1
N112361: D4.1(CATHODE) R39.1 TP6.1(TP)
N118997: L3.1 U9.32 U9.33
N127292: U9.6 U13.3
N127671: TP12.1(TP) U13.2
N135275: C42.2 U9.8 Y1.1
N135282: C41.2 U9.9 Y1.2
N169854: D5.1(CATHODE) R44.2 TP14.1(TP)
N271370: LD1.2 Q2.3

Pads without a net: J1 9; J2 10 12 17 18 19 20 21 22 23 24 42 47 49 51 53 57 58 59 60 61 62 63 64 65 66 67 68; LD1 3 4; U1 8; U8 E3; U9 1 7 19 23 24 26 28 29 34 35 46 48 74 75 76 91 92 93 103 104 116 126 127 133 134 136 140; U14 C2; U15 7

## Via types
v1: diameter 0.3, hole 0.15, TOP to BOTTOM, 139 vias
v2: diameter 0.4, hole 0.2, TOP to BOTTOM, 160 vias
v3: diameter 0.6, hole 0.3, TOP to BOTTOM, 88 vias

## Routing (per net, layer and track width the routed paths; a pad name or vN(x,y) marks a point on that pad's centre or on a via; arc(x,y) is an arc through that point)
GND: length 105.1
  TOP w0.1: v2(29.24,55.78) 29.07,55.78
  TOP w0.15: v2(37.6,65.5) 37.2,65.9 J2.55 ; v2(32.8,68) J2.5 J2.6 J2.7 ; v2(40.8,64.3) 41.6,64.3 42,64.7 42,65.4 ; v2(36,68) J2.13 36,70 v2(35.5,70.5) ; 42,65.4 J2.43 ; 42,65.4 41.8,65.4 41.6,65.6 J2.44 ; v2(35.5,70.5) 35.2,70.2 J2.11 ; v2(35.5,70.5) 36.2,70.5 36.4,70.3 J2.14 ; J2.69 31.6,65.8 v2(31.9,65.5) ; J2.7 v2(33.6,68) ; J2.7 J2.8 J2.9 v2(34.4,68) ; v2(30.9,65.5) 31.2,65.8 J2.70 ; J2.56 36.8,65.8 v2(36.5,65.5)
  TOP w0.3: U8.E6 v1(37.08,35.62)
  TOP w0.38: v2(39.5,44.53) C19.2 38.85,43.95 38.56,43.66 C20.2
  BOTTOM w0.15: U9.30 v2(32.2,28.7) ; U9.31 v2(31.7,28.43)
  BOTTOM w0.2: U14.C1 U14.D1 v2(12.5,43.6) ; v2(40.4,57.2) 40.6,57 U4.B2 ; U9.107 v2(46.2,47.6) ; U9.16 39.2,26.5 v2(39.65,26.05) ; U9.51 v2(26.1,36.3) ; v2(14,45.4) 14.3,45.1 U14.B2 ; U9.61 v2(26.1,41.3) ; v2(47.1,31.9) 47.5,32.3 U9.138 ; U9.38 v2(26.1,29.8) ; U9.94 v2(39.7,47.6) ; U9.83 34.2,49.6 v2(33.7,50.1) ; U9.120 v2(47.57,41.3) ; v2(41.3,57.2) 41.1,57 U4.A2
  BOTTOM w0.25: v2(63.3,40.6) 63.31,40.6 U5.11 ; U1.3 v2(20.62,54.2)
  BOTTOM w0.3: C43.1 v2(12.11,42.79) ; v2(14.45,27) R26.2 ; R1.2 v2(20.43,52.2) ; U15.14 v2(16.07,38.3) ; U7.B2 U7.A2 v2(40.04,59.3) ; C41.1 v2(40.7,20.65) ; U15.5 v2(17.37,35.7) ; R27.2 v2(17.45,21) ; C25.2 v2(24.75,16.87) ; R9.1 v2(33.7,58.75) ; R28.2 v2(16.25,21) ; U15.8 v2(15.42,35.7) ; U10.22 v2(63.9,30.7) ; C12.1 v2(39.51,55) ; C11.1 v2(43.15,55.03) ; R52.1 v2(54.15,43.95) ; C27.2 v2(14.35,33.48) ; U10.23 v2(64.2,30.2) ; R4.1 v2(34.9,54.55) ; R53.1 v2(52.95,31.95) ; U11.3 v2(29.7,16.45) ; v2(32.5,55.71) R5.1 ; C26.2 v2(18.27,33.36) ; C42.1 v2(45.4,20.65) ; J3.4 v3(61.63,49.3)
  BOTTOM w0.38: TP11.1 56.16,45.94 55.5,46.6 D8.2 ; U6.4 v2(34.79,61.65) ; C39.1 C38.1 v2(46.85,52.93) ; v3(56.92,53.14) 55.87,52.1 D7.2 ; v3(37.3,52.43) 37.3,51.19 37.06,50.95 C36.1 ; R32.1 v2(25.5,63.95) ; C10.2 v2(29.39,62.93) ; C37.1 v2(40.85,52.19)
  BOTTOM w0.5: v2(23.5,51.6) 23.9,52 C3.2 ; C14.1 v3(60.3,37.01) ; C35.1 v2(23.51,46.1) ; C2.2 v3(13.7,57) ; C31.1 v2(52.09,40.27) ; C40.1 v2(34.75,22.9) ; R3.2 v3(22.35,57.05) ; C29.1 v2(52.09,28.67) ; C15.2 v3(68.88,39.8) ; R14.1 v2(58.85,37.34) ; C30.1 v2(52.8,35.85) ; J3.5 v3(64.9,54.73) ; C1.2 v3(19.7,48.5) ; C34.1 v2(23.51,41) ; C32.1 v2(22.7,30.25) ; C16.2 v3(68.89,41.2) ; C13.1 v3(60.3,44.08) ; C4.2 v3(11.6,55.3) ; C23.2 v2(54.9,30.15) ; C28.1 v2(39.4,23.7) ; C24.2 v2(54.67,31.3) ; C33.1 v2(23.51,37.6) ; R15.1 v2(58.95,43.74) ; J3.6 v3(64.9,48.93)
  BOTTOM w1: TP7.1 18.98,12.2 D4.2
  vias: v2(4.81,35.06) v2(4.8,33.36) v2(4.82,32.33) v2(4.85,30.64) v2(5.7,35.06) v2(5.7,33.35) v2(5.68,32.32) v2(5.67,30.63) v2(15.9,37.5) v2(15.9,36.5) v2(16.4,37) v2(16.9,37.5) v2(16.9,36.5) v2(19.63,53.57) v2(19.85,54.18) v2(20.09,54.79) v2(28.57,21.68) v2(28.56,19.93) v2(29.23,54.92) v2(29.27,56.64) v2(29.52,21.69) v2(29.52,19.96) v2(29.65,57.21) v2(61.3,31.1) v2(61.3,30.2) v2(61.3,29.3) v2(62.2,31.1) v2(62.2,30.2) v2(62.2,29.3) v2(63.1,31.1) v2(63.1,30.2) v2(63.1,29.3) v2(63.3,41.31) v2(63.3,39.92) v3(2,38) v3(2.1,40) v3(2.1,36) v3(2.2,42) v3(2.2,34) v3(2.5,44) v3(2.5,32) v3(2.9,46) v3(2.9,30) v3(3.4,48) v3(3.4,28) v3(4,26) v3(4.1,50) v3(4.8,52) v3(4.8,24) v3(5.8,54) v3(5.8,22) v3(6.8,56) v3(6.8,20) v3(8,58) v3(8,18) v3(9.5,60) v3(9.5,16) v3(11.1,14) v3(11.2,62) v3(12.5,63.5) v3(12.5,12.5) v3(15.4,66) v3(15.4,10) v3(18.1,68) v3(18.1,8) v3(21.5,70) v3(21.6,6) v3(26.2,72) v3(26.2,4) v3(37.57,53.17) v3(38,74) v3(38,2) v3(49.8,72) v3(49.8,4) v3(54.4,6) v3(54.5,70) v3(57.9,68) v3(57.9,8) v3(60.6,66) v3(60.6,10) v3(63.5,63.5) v3(63.5,12.5) v3(64.8,62) v3(64.9,14) v3(66.5,60) v3(66.5,16) v3(68,58) v3(68,18) v3(69.2,56) v3(69.2,20) v3(70.2,54) v3(70.2,22) v3(71.2,52) v3(71.2,24) v3(71.9,50) v3(72,26) v3(72.6,48) v3(72.6,28) v3(73.1,46) v3(73.1,30) v3(73.5,44) v3(73.5,32) v3(73.8,42) v3(73.8,34) v3(73.9,40) v3(73.9,36) v3(74,38)
VDD33: length 88.1
  TOP w0.3: U8.E1 37.6,40.35 38.25,41 C20.1 ; C22.1 34.94,33.56 35.2,33.3 35.59,33.3 ; 35.59,33.3 35.59,33.81 36.08,34.3 38.2,34.3 38.7,34.8 38.7,35.8 U8.D6 ; 35.59,33.3 36.2,33.3 36.4,33.1 36.4,32.6 36.68,32.32 R34.1
  TOP w0.5: C19.1 39.05,42.45 38.8,42.7 C20.1
  VCC w0.2: v2(61.61,39.33) 61.43,39.5 v1(61.43,40.6) 61.43,41.53 v2(61.67,41.77)
  BOTTOM w0.2: U5.4 v1(61.43,40.6) ; U9.39 v2(25.5,30.3) ; U9.84 v2(34.7,50.1) ; v2(13.95,42) 13.95,42.65 14.3,43 U14.B1 ; U9.106 v2(45.7,50.1) ; U9.17 v2(38.7,25.9) ; U9.72 v2(25.4,46.8) ; v2(25.5,41.8) U9.62 ; v2(50.2,40.85) 50.15,40.8 U9.121 ; v2(50.1,29.3) U9.144 ; U9.95 v2(40.2,50.1) ; v2(25.6,36.8) U9.52 ; U9.108 v2(46.7,50.1) ; U9.131 v2(50,35.8)
  BOTTOM w0.3: v2(25.6,36.8) 25.55,36.85 C33.2 ; C24.1 56.75,30.75 56.49,30.49 C23.1 56.85,30.15 56.9,30.1 v2(57.3,30.1) 57.4,30.2 U10.5 ; U15.6 v2(16.72,33.72) ; v2(16.72,33.72) 15.85,32.85 C27.1 C26.1 17.31,33.13 v2(16.72,33.72) ; R51.2 52.07,30.17 51.9,30 51.28,30 51.13,29.85 C29.2 50.55,29.25 50.5,29.3 v2(50.1,29.3) ; R20.2 v2(44.55,60.73) ; C30.2 50.05,35.85 v2(50,35.8) ; C32.2 25.45,30.25 v2(25.5,30.3) ; C34.2 25.45,41.75 v2(25.5,41.8) ; R42.1 v2(14,46.15) R43.1 ; C31.2 v2(50.2,40.85) ; R50.2 53.27,45.88 v2(53.29,45.9) ; v2(36.1,55.73) R6.2 35.42,55.7 34.35,55.7 ; C35.2 25.35,46.85 v2(25.4,46.8) ; C43.2 13.9,42.05 v2(13.95,42) ; v2(38.7,25.9) 38.65,25.85 C28.2
  BOTTOM w0.38: C39.2 45.65,50.15 v2(45.7,50.1) ; C37.2 40.15,50.15 v2(40.2,50.1) ; C36.2 35.05,50.95 34.7,50.6 v2(34.7,50.1) ; R45.1 v2(11.66,34.69) ; R46.1 v2(53.29,45.9) ; v2(46.7,50.1) 46.7,50.5 46.85,50.65 C38.2
  BOTTOM w0.5: R48.1 22.4,27.8 21.91,27.31 Q3.2 ; R47.1 53.74,54.05 54.44,54.75 TP8.1 58.66,54.75 59.65,53.76 59.65,52.8 60.15,52.3 J3.1 ; L3.2 v3(31.2,22.69) ; U11.5 25.54,18.35 25.3,18.59 C25.1 24.75,18.64 24.15,19.24 R38.1 ; U13.1 v3(51.52,22.82) ; R40.1 v2(33.65,22.9)
  vias: v2(30.8,53.37) v2(30.8,52.23) v2(31.3,53.1) v2(31.3,52.47) v2(31.8,53.38) v2(31.8,52.23) v2(61.08,41.77) v2(61.08,39.33)
VDD_CAM1: length 69.6
  VCC w0.5: v2(64.05,38.11) 64.2,38.11 64.24,38.07 64.72,38.07 64.76,38.11 66.6,38.11 69.75,34.96 69.75,25.68 63.7,19.63 60.97,19.63 55.42,14.07 55.42,12.63 48.18,5.39 28.8,5.39 27.82,6.37 J1.1
  vias: v1(64.01,38.63) v1(64.52,38.16) v2(64.48,38.65)
VDD_CAM2: length 58.4
  VCC w0.5: v2(64.52,42.99) 66.4,42.99 67.09,43.67 67.09,54.88 63.44,58.52 59.15,58.52 57.21,60.47 57.21,64.2 53.44,67.97 48.79,67.97 47.59,69.16 32.74,69.16 v2(31.4,70.5)
  vias: v1(64.04,43.05) v1(64.57,42.51) v2(29.96,70.96) v2(30.4,70.5) v2(30.9,70.96) v2(31.9,70.9) v2(64.09,42.51)
VSS: length 1.2
  BOTTOM w0.2: U9.71 v2(28.5,46.3)
BUS_SWITCH: length 2.8
  BOTTOM w0.15: U9.135 49.9,33.8 50.55,33.15 R24.1
CAM1_D0: length 35.6
  TOP w0.15: 35.44,10.6 35.44,13.11 41.33,19 53.74,19 57.57,22.83 57.57,27.77 58,28.2 v1(58.3,28.2)
  BOTTOM w0.15: U10.1 v1(58.3,28.2)
CAM1_D1: length 45.4
  TOP w0.15: 37.98,8.06 36.43,6.51 35.14,6.51 34.2,7.45 34.2,13.87 39.93,19.6 52.89,19.6 56.92,23.63 56.92,28.22 57.9,29.2 v1(58.3,29.2)
  BOTTOM w0.15: U10.3 v1(58.3,29.2)
CAM1_D2: length 38.2
  TOP w0.15: 37.98,10.6 37.98,13.82 42.48,18.32 54.42,18.32 58.25,22.15 58.25,26.18 59,26.93 59,29.7 58.7,30 58,30 57.9,30.1 57.9,30.5 v1(58.2,30.8)
  BOTTOM w0.15: U10.7 58.6,31.2 v1(58.2,30.8)
CAM1_D3: length 58.6
  TOP w0.15: v1(54.9,32.5) 54.5,32.5 53.96,31.96 53.96,30.34 54.4,29.9 54.4,23.05 52.9,21.54 39.72,21.54 31.68,13.5 31.68,6.82 32.98,5.52 37.98,5.52 J1.6
  BOTTOM w0.15: U10.9 58.6,32.2 58.3,32.5 v1(54.9,32.5)
CAM1_D4: length 38.9
  TOP w0.15: J1.13 40.52,14.32 43.49,17.3 54.6,17.3 59.99,22.69 64.49,22.69 66.7,24.9 66.7,27.6 v1(66.1,28.2)
  BOTTOM w0.15: U10.27 v1(66.1,28.2)
CAM1_D5: length 43
  TOP w0.15: v1(66.6,29.4) 66.9,29.4 67.44,28.86 67.44,24.54 64.84,21.94 60.65,21.94 55.06,16.35 44.86,16.35 41.83,13.31 41.83,9.29 J1.7
  BOTTOM w0.15: v1(66.6,29.4) 66.2,29.4 66,29.2 U10.25
CAM1_D6: length 41.1
  TOP w0.15: J1.12 43.06,12.39 46.16,15.49 55.26,15.49 60.9,21.13 65.29,21.13 68.1,23.93 68.1,29.8 66.7,31.2 v1(66,31.2)
  BOTTOM w0.15: v1(66,31.2) U10.21
CAM1_D7: length 44.6
  TOP w0.15: v1(66,32.2) 66.6,32.2 68.82,29.98 68.82,23.59 65.55,20.32 62.02,20.32 56.01,14.31 46.98,14.31 44.41,11.73 44.41,9.25 45.6,8.06
  BOTTOM w0.15: U10.19 v1(66,32.2)
CAM1_HSYNC: length 60
  VCC w0.15: v1(11,38.9) 10.1,38 10.1,32.54 13,29.64 16.59,29.64 20.34,25.9 20.34,13.8 21.86,12.27 28.32,12.27 29.09,11.5 29.09,7.32 30.1,6.31 31.95,6.31 32.9,7.26 J1.3
  BOTTOM w0.15: v1(11,38.9) 13.3,41.2 16.6,41.2 17.37,40.43 U15.16
CAM1_PCLK: length 46.9
  VCC w0.15: v1(19.5,36.02) 19.98,36.02 20.4,35.6 20.4,29.08 23.12,26.36 23.12,17.48 26.27,14.34 42.51,14.34 45.6,11.25 45.6,10.6
  BOTTOM w0.15: U15.4 v1(19.5,36.02)
CAM1_PWDN: length 25.3
  BOTTOM w0.15: J1.10 48.14,13.06 45.6,15.6 38.8,15.6 37.7,16.7 37.7,25.8 38.2,26.3 U9.18
CAM1_PWR_EN: length 15.2
  TOP w0.15: v1(52.8,38.8) 57.1,38.8 58.2,39.9 v1(58.85,39.9)
  BOTTOM w0.15: v1(58.85,39.9) 59.15,40.2 U5.3 ; v1(52.8,38.8) U9.125
  BOTTOM w0.2: R14.2 v1(58.85,39.9)
CAM1_RST: length 29.8
  BOTTOM w0.15: U9.27 33.7,26.3 32.5,25.1 32.5,16.57 28.92,12.99 28.92,7.18 29.83,6.26 33.64,6.26 35.44,8.06
CAM1_VSYNC: length 47.6
  VCC w0.15: J1.2 31.55,9.26 31.55,12.17 30.54,13.18 24.03,13.18 21.82,15.38 21.82,26.01 17.04,30.79 13.33,30.79 10.96,33.16 10.96,36.95 11.98,37.97 v1(13.3,37.97)
  BOTTOM w0.15: U15.12 v1(13.3,37.97)
CAM2_D0: length 65
  TOP w0.15: J2.26 v1(41.2,68.1)
  VCC w0.15: v1(41.2,68.1) 41.2,67.22 40.78,66.8 39.9,66.8 39,65.9 39,63.52 40.59,61.93 45.84,61.93 51.33,56.43 51.33,51.92 53.11,50.14 53.11,47.91 52.7,47.5 52.7,45.2 53.11,44.79 53.11,41.69 53,41.59 53,40 52.2,39.2 52.2,34.29 51.75,33.84 51.75,33.59 51.71,33.55 51.71,32.92 52.58,32.05 52.58,31.79 52.88,31.49 52.88,27.2 54.49,25.59 v1(61.7,25.59)
  BOTTOM w0.15: U10.33 v1(61.7,25.59)
CAM2_D1: length 65.8
  TOP w0.15: J2.25 v1(40.8,67.9)
  VCC w0.15: v1(40.8,67.9) 40.8,67.66 40.44,67.3 39.4,67.3 38.5,66.4 38.5,62.53 39.63,61.4 45.15,61.4 50.54,56.01 50.54,51.23 51.98,49.79 51.98,41.78 51.5,41.3 51.5,33.69 51.38,33.57 51.38,32.03 52.12,31.29 52.12,29.78 52.5,29.4 52.5,27.9 52.12,27.52 52.12,26.76 53.87,25.02 v1(61.2,25.02)
  BOTTOM w0.15: v1(61.2,25.02) U10.34
CAM2_D2: length 49.5
  TOP w0.15: J2.28 v1(42,68.17)
  VCC w0.15: v1(55.32,37.1) 55.32,51.2 53.22,53.29 53.22,56.65 46.48,63.39 42.13,63.39 41.64,63.88 41.64,66.03 42,66.39 v1(42,68.17)
  BOTTOM w0.15: v1(55.32,37.1) 55.32,36.28 56.4,35.2 60.7,35.2 61.2,34.7 U10.12
CAM2_D3: length 52.2
  TOP w0.15: J2.27 v1(41.6,67.9)
  VCC w0.15: v1(54.2,38.2) 54.2,43.47 54.52,43.79 54.52,44.11 54.2,44.43 54.2,50.82 52.4,52.62 52.4,56.44 46.14,62.7 41.3,62.7 39.5,64.5 39.5,65.5 40.2,66.2 40.89,66.2 41.6,66.91 v1(41.6,67.9)
  BOTTOM w0.15: v1(54.2,38.2) 54.7,37.7 55.9,37.7 57.7,35.9 60.8,35.9 61.7,35 U10.13
CAM2_D4: length 59.7
  TOP w0.15: J2.30 v1(42.8,68.17)
  VCC w0.15: v1(42.8,68.17) 42.8,66.4 44.43,64.77 50.16,64.77 51.9,63.02 51.9,61.12 57.86,55.16 58.96,55.16 60.9,53.22 60.9,52.2 59.97,51.27 59.97,48.47 59.59,48.09 ; v1(62.7,26.57) 62.57,26.45 61.42,26.45 60.36,27.51 60.36,32.74 57.16,35.94 57.16,42.28
  VCC w0.2: 59.59,48.09 57.13,45.63 57.13,42.3 57.16,42.28
  BOTTOM w0.15: v1(62.7,26.57) U10.31
CAM2_D5: length 56.4
  TOP w0.15: J2.29 v1(42.4,67.91)
  VCC w0.15: v1(63.2,26.21) 63.2,26.2 63.05,26.05 60.94,26.05 59.7,27.29 59.7,31.89 56.29,35.3 56.29,51.78 54.08,53.99 54.08,57.02 47,64.1 43.44,64.1 42.4,65.14 v1(42.4,67.91)
  BOTTOM w0.15: v1(63.2,26.21) U10.30
CAM2_D6: length 58.5
  TOP w0.15: v1(43.6,68.17) J2.32
  VCC w0.15: 63.56,35.15 63.35,35.15 63.2,35 v1(63.2,34.4) ; 62.08,44.53 63.05,45.5 63.05,54.15 59.85,57.35 58.5,57.35 54.43,61.42 54.43,63.69 51.85,66.27 44.43,66.27 43.6,67.1 v1(43.6,68.17)
  VCC w0.2: 62.08,44.53 60.55,44.53 60.51,44.58 58.48,44.58 57.91,44 57.91,42.11 57.86,42.06 57.86,37.07 58.29,36.64 58.51,36.64 59.53,35.62 63.09,35.62 63.56,35.15
  BOTTOM w0.15: v1(63.2,34.4) U10.16
CAM2_D7: length 54.3
  TOP w0.15: J2.31 v1(43.2,67.9)
  VCC w0.15: 62.7,34.68 v1(62.7,34.1) ; 60,47.4 60.77,48.17 60.77,50.75 61.8,51.78 61.8,53.89 59.12,56.57 57.7,56.57 52.82,61.45 52.82,63.81 50.93,65.7 44.4,65.7 43.2,66.9 v1(43.2,67.9)
  VCC w0.2: 62.7,34.68 62.07,35.32 58.92,35.32 57.51,36.73 57.51,42.21 57.56,42.26 57.56,44.96 60,47.4
  BOTTOM w0.15: U10.15 v1(62.7,34.1)
CAM2_HSYNC: length 50.4
  TOP w0.15: v1(15.42,40.1) 15.42,40.5 15.62,40.7 19.6,40.7 21.2,42.3 21.2,45.6 21.8,46.2 21.8,47 22.7,47.9 23.5,47.9 27.5,51.9 27.5,59.1 29.68,61.28 35.06,61.28 35.09,61.3 42.5,61.3 43.2,62 43.8,62 44.2,62.4 44.2,64.1 43.6,64.7 J2.39
  BOTTOM w0.15: U15.13 v1(15.42,40.1)
CAM2_KEY1: length 5.2
  TOP w0.15: v1(40,67.9) J2.48
  BOTTOM w0.15: TP22.1 41.7,70.2 40,68.5 v1(40,67.9)
CAM2_KEY2: length 4.5
  TOP w0.15: J2.50 v1(39.2,67.9)
  BOTTOM w0.15: v1(39.2,67.9) TP21.1
CAM2_KEY3: length 5.2
  TOP w0.15: J2.52 v1(38.4,67.9)
  BOTTOM w0.15: TP20.1 36.7,70.3 38.4,68.6 v1(38.4,67.9)
CAM2_KEY4: length 7
  TOP w0.15: J2.54 37.6,67.7 v1(37.8,67.9)
  BOTTOM w0.15: TP19.1 34.2,70.2 35.3,69.1 36.9,69.1 37.8,68.2 v1(37.8,67.9)
CAM2_PCLK: length 47.9
  TOP w0.15: v1(18.6,41.9) 19.79,43.09 19.79,46.89 20.3,47.4 20.3,47.9 21.5,49.1 22.6,49.1 23.6,50.1 23.6,50.7 25.5,52.6 25.5,60.4 27.63,62.53 27.84,62.53 27.91,62.45 30.32,62.45 30.77,62.9 42.3,62.9 42.8,63.4 J2.41
  BOTTOM w0.15: U15.1 v1(18.6,41.9)
CAM2_PWR_EN: length 15.5
  TOP w0.15: v1(53.2,39.3) 56.4,39.3 58.2,41.1 v1(58.9,41.1)
  BOTTOM w0.15: v1(58.9,41.1) 59,41 U5.5 ; U9.124 v1(53.2,39.3)
  BOTTOM w0.2: v1(58.9,41.1) 58.9,41.98 R15.2
CAM2_RS232_RX: length 11.4
  TOP w0.15: J2.15 36.8,68.2 v1(36.6,68)
  BOTTOM w0.15: TP18.1 29.7,69.3 32.1,66.9 36.3,66.9 36.6,67.2 v1(36.6,68)
CAM2_RS232_TX: length 11.4
  TOP w0.15: v1(37.2,68) J2.16
  BOTTOM w0.15: v1(37.2,68) 37.2,67 36.6,66.4 31.7,66.4 31.3,66.8 TP17.1
CAM2_VSYNC: length 57.4
  TOP w0.15: v1(11.8,36.4) 11.8,38.5 14.6,41.3 19.1,41.3 20.6,42.8 20.6,46.2 21.1,46.7 21.1,47.6 22,48.5 22.9,48.5 26.5,52.1 26.5,59.8 28.8,62.1 42.3,62.1 42.8,62.6 43.1,62.6 43.5,63 43.5,64 43.2,64.3 J2.40
  BOTTOM w0.15: U15.9 12.18,36.02 v1(11.8,36.4)
DAY_NIGHT: length 14
  BOTTOM w0.15: U7.C2 42.4,59.3 42.67,59.03 R22.2 44.53,59.03 R20.1 44.55,53.8 42.7,51.95 U9.100
DCMI_D0: length 38
  TOP w0.15: v1(40.7,47.3) 40.7,44.02 44.81,39.91 44.81,34.94 45.9,33.85 54.85,33.85 55.6,33.1 55.6,28.3 v1(56.1,27.8)
  BOTTOM w0.15: U10.36 60.2,26.77 59.73,26.3 57.6,26.3 v1(56.1,27.8) ; U9.96 v1(40.7,47.3)
DCMI_D1: length 34.5
  TOP w0.15: v1(56.5,28.7) 56.2,29 56.2,33.2 55.2,34.2 46.1,34.2 45.26,35.04 45.26,40.71 41.2,44.76 v1(41.2,47.72)
  BOTTOM w0.15: U10.2 v1(56.5,28.7) ; v1(41.2,47.72) U9.97
DCMI_D2: length 32.5
  TOP w0.15: v1(41.7,47.3) 41.7,45.19 45.71,41.18 45.71,35.19 46.3,34.6 51.6,34.6 52.2,35.2 53.3,35.2 53.8,35.7 56.3,35.7 57.8,34.2 57.8,31.87 57.97,31.7 v1(58.3,31.7)
  BOTTOM w0.15: U10.8 v1(58.3,31.7) ; v1(41.7,47.3) U9.98
DCMI_D3: length 32.1
  TOP w0.15: v1(60.2,34.1) 60.2,35 58.7,36.5 52.5,36.5 51,35 47,35 46.22,35.78 46.22,41.69 42.2,45.71 v1(42.2,47.72)
  BOTTOM w0.15: v1(60.2,34.1) U10.10 ; U9.99 v1(42.2,47.72)
DCMI_D4: length 36.8
  BOTTOM w0.15: U10.28 64.2,25.3 63.15,24.25 56.65,24.25 53.2,27.7 53.2,30.7 53.8,31.3 53.8,42.1 53.1,42.8 51.5,42.8 50.6,43.7 50.6,44.9 50.2,45.3 U9.112
DCMI_D5: length 36.9
  TOP w0.1: 60.38,42.8 v1(49.7,42.8) ; v1(66.4,28.7) 66.4,28.9 66.1,29.2 66.1,30 65.8,30.3 65.5,30.3 65.1,30.7 65.1,33.2 66.4,34.5 66.4,43.79
  TOP w0.15: 66.4,43.79 66.4,44.09 65.72,44.77 62.3,44.77 61.29,43.76 61.29,43.71 60.38,42.8
  BOTTOM w0.1: U9.117 v1(49.7,42.8) ; v1(66.4,28.7) U10.26
DCMI_D6: length 31.3
  VCC w0.15: v1(52.73,24.99) 53.68,24.05 64.15,24.05 67.1,27 67.1,31 v1(66.4,31.7)
  BOTTOM w0.15: U10.20 v1(66.4,31.7) ; U9.4 45.2,26.6 46.8,24.99 v1(52.73,24.99)
DCMI_D7: length 37.2
  BOTTOM w0.15: U9.5 44.7,26.4 46.68,24.42 52.13,24.42 52.92,23.63 64.77,23.63 67.19,26.05 67.19,33.54 66.56,34.17 64.66,34.17 64.2,33.71 U10.18
DCMI_D8: length 29
  TOP w0.15: J2.34 v1(44.4,68.17)
  BOTTOM w0.15: U9.111 47.6,45.8 47.2,46.2 47.2,46.9 48.3,48 48.3,51.9 50.1,53.7 50.1,63.2 46.9,66.4 45.4,66.4 44.4,67.4 v1(44.4,68.17)
DCMI_D9: length 30
  TOP w0.15: J2.33 v1(44,67.9)
  BOTTOM w0.15: U9.113 47.5,44.8 46.5,45.8 46.5,46.9 47.7,48.1 47.7,52.2 49.4,53.9 49.4,62.8 46.3,65.9 45.2,65.9 44,67.1 v1(44,67.9)
DCMI_D10: length 33.3
  TOP w0.127: 47.1,41.1 47.1,42.3 48.5,43.7 50.6,43.7 51.2,44.3 51.2,46.1
  TOP w0.15: v1(47.3,40.6) 47.1,40.8 47.1,41.1 ; 51.2,46.1 51.2,51.7 46.2,56.7 46.2,64.37 44.8,65.77 J2.36
  BOTTOM w0.15: U9.122 47.6,40.3 v1(47.3,40.6)
DCMI_D11: length 110.8
  TOP w0.15: J2.35 v1(44.8,67.9)
  VCC w0.15: 63.09,43.84 63.68,44.43 63.68,55.12 61.14,57.66 59.13,57.66 55.8,60.99 55.8,63.69 52.58,66.9 45.3,66.9 44.8,67.4 v1(44.8,67.9) ; v1(36.2,26.42) 36.2,20 35.59,19.39 35.59,18.72 36.31,17.99 57.39,17.99 61.9,22.5 64.3,22.5 68.3,26.5 68.3,34.51
  VCC w0.2: 63.09,43.84 62.18,43.84 61.3,42.95 60.14,42.95 59.32,42.14 59.32,39.03 61.61,36.74 66.06,36.74 68.3,34.51
  BOTTOM w0.15: U9.22 v1(36.2,26.42)
DCMI_D12: length 53.8
  TOP w0.15: J2.38 44,65 44.8,64.2 44.8,61.9 44.1,61.2 43.2,61.2 42.3,60.3 29.68,60.3 28.13,58.75 28.13,55.71 28.12,55.71 28.12,51.22 24.6,47.7 24.6,46.05 23.65,45.1 22.9,45.1 22.3,44.5 v1(22.3,40.7)
  BOTTOM w0.15: v1(22.3,40.7) 22.3,36.5 22.9,35.9 23.49,35.9 24.09,35.3 U9.49
DCMI_D13: length 38
  TOP w0.127: 46.7,44.97 46.83,45.1 49.2,45.1 50.1,46 50.1,51.2 47.9,53.4
  TOP w0.15: 47.9,53.4 45.42,55.88 45.42,64.55 44.4,65.57 J2.37 ; v1(47.4,35.5) 46.7,36.2 46.7,44.97
  BOTTOM w0.15: v1(47.4,35.5) 47.6,35.3 U9.132
DCMI_HSYNC: length 30.8
  TOP w0.15: v1(24.5,31.1) 12.7,31.1 10.5,33.3 10.5,37.5 v1(10.9,37.9)
  BOTTOM w0.15: U9.40 26,30.8 25.7,31.1 v1(24.5,31.1) ; v1(10.9,37.9) 13.7,40.7 16.2,40.7 16.72,40.18 U15.15
DCMI_PIXCLK: length 12.5
  VCC w0.15: v1(19.5,36.67) 20.3,36.67 21.07,35.9 21.07,32.92 21.89,32.1 v1(22.6,32.1)
  BOTTOM w0.15: v1(22.6,32.1) 25.9,32.1 26.2,31.8 U9.42 ; v1(19.5,36.67) U15.3
DCMI_VSYNC: length 45.5
  TOP w0.15: v1(12.7,37.3) 12.5,37.1 12.5,34.1 14.1,32.5 32,32.5 35.5,29 43.8,29 45.7,30.9 v1(45.7,32.4)
  BOTTOM w0.15: U9.137 46.1,32.8 v1(45.7,32.4) ; v1(12.7,37.3) 12.72,37.32 U15.11
FMC_A0: length 24.1
  TOP w0.102: 42.1,38.4 U8.A3
  TOP w0.15: 42.1,38.4 42.3,38.4 43.42,37.28 43.42,34.11 44.05,33.48 44.05,33.27 43.7,32.92 43.49,32.92 43.19,33.22 42.97,33.22 42.81,33.06 42.81,32.85 43.11,32.55 43.11,32.34 42.45,31.68 42.45,31.47 42.62,31.3 42.83,31.3 43.21,31.69 43.43,31.69 44.06,31.05 44.27,31.05 44.44,31.22 44.44,31.43 43.8,32.06 43.8,32.27 44.42,32.9 44.63,32.9 45.19,32.34 45.19,31.28 43.81,29.9 43.59,29.9 43.29,30.2 42.7,30.2 v1(42.2,29.7)
  BOTTOM w0.15: v1(42.2,29.7) U9.10
FMC_A1: length 23.6
  TOP w0.102: U8.A4 42.05,37.65
  TOP w0.15: v1(41.7,30.1) 41.95,30.35 41.95,31.03 41.83,31.15 41.22,31.15 41.07,31 41.07,30.67 40.8,30.4 40.3,30.4 40.19,30.51 40.19,30.79 40.34,30.94 40.53,30.94 40.68,31.09 40.68,31.49 40.53,31.64 40.47,31.64 40.19,31.92 40.19,32.33 40.34,32.48 40.94,32.48 41.09,32.33 41.09,31.8 41.24,31.65 41.47,31.65 41.62,31.8 41.62,32.33 41.77,32.48 42.04,32.48 42.19,32.63 42.19,32.86 42.04,33.01 41.57,33.01 41.42,33.16 41.42,33.45 41.27,33.6 41.06,33.6 40.89,33.44 40.89,33.16 40.74,33.01 40.34,33.01 40.19,33.16 40.19,33.68 40.53,34.02 42.39,34.02 42.92,34.55 42.92,36.78 42.05,37.65
  BOTTOM w0.15: v1(41.7,30.1) U9.11
FMC_A2: length 24
  TOP w0.102: 42.1,36.7 41.65,37.15 40.85,37.15 U8.A5
  TOP w0.15: 42.1,36.7 42.4,36.4 42.4,34.8 42.12,34.52 40.07,34.52 39.65,34.1 39.65,31.54 39.46,31.35 39.15,31.35 39,31.2 39,30.66 38.85,30.51 38.62,30.51 38.47,30.66 38.47,31.2 38.32,31.35 38.09,31.35 37.94,31.2 37.94,30.66 37.79,30.51 37.56,30.51 37.41,30.66 37.41,31.2 37.26,31.35 36.41,31.35 36.26,31.2 36.26,30.14 36.54,29.86 40.94,29.86 v1(41.2,29.6)
  BOTTOM w0.15: v1(41.2,29.6) U9.12
FMC_A3: length 24.8
  TOP w0.15: U8.B3 v1(40.24,38.79)
  BOTTOM w0.102: 41.16,34.9 41.16,35.74 40.6,36.3 40.6,37.2 41.2,37.8 41.2,38.4 40.81,38.79 v1(40.24,38.79)
  BOTTOM w0.15: U9.13 40.7,30.23 41.13,30.66 42.87,30.66 43.02,30.51 43.02,29.77 43.17,29.62 43.4,29.62 43.55,29.77 43.55,30.51 43.7,30.66 43.98,30.66 44.37,31.05 44.37,31.37 44.52,31.52 44.89,31.52 45.04,31.67 45.04,31.9 44.89,32.05 44.52,32.05 44.37,32.2 44.37,32.43 44.52,32.58 44.89,32.58 45.04,32.73 45.04,32.96 44.89,33.11 44.52,33.11 44.37,33.26 44.37,33.72 43.9,34.19 43.28,34.19 43.13,34.34 43.13,35.22 42.98,35.37 42.75,35.37 42.6,35.22 42.6,34.34 42.45,34.19 41.55,34.19 41.16,34.58 41.16,34.9
FMC_A4: length 24.4
  TOP w0.15: U8.B4 v1(40.21,38.01)
  BOTTOM w0.102: v1(40.21,38.01) 40.21,37.61 39.98,37.38 39.98,34.9
  BOTTOM w0.15: U9.14 40.2,29.6 40.05,29.75 39.46,29.75 39.31,29.9 39.31,30.13 39.46,30.28 39.46,31.18 39.61,31.33 39.91,31.33 40.06,31.18 40.06,30.85 40.21,30.7 40.45,30.7 40.6,30.85 40.6,31.18 40.75,31.33 42.02,31.33 42.17,31.48 42.17,32.02 42.32,32.17 42.55,32.17 42.7,32.02 42.7,31.48 42.85,31.33 43.13,31.33 43.6,31.8 43.6,33.04 43.2,33.44 42.92,33.44 42.77,33.29 42.77,32.92 42.62,32.77 42.39,32.77 42.24,32.92 42.24,33.29 42.09,33.44 41.86,33.44 41.71,33.29 41.71,32.92 41.56,32.77 41.33,32.77 41.18,32.92 41.18,33.23 40.77,33.64 40.55,33.64 40.06,33.15 39.85,33.15 39.68,33.32 39.68,33.53 40.18,34.02 40.18,34.23 39.98,34.43 39.98,34.9
FMC_A5: length 23.7
  TOP w0.15: U8.C3 v1(39.48,38.02)
  BOTTOM w0.102: 39.1,34.9 39.1,35.4 38.92,35.58 38.92,36.02 39.1,36.2 39.1,37.63 v1(39.48,38.02)
  BOTTOM w0.15: 39.1,34.9 39.12,34.88 39.12,34.52 39.41,34.23 39.41,33.99 39.12,33.7 39.12,33.08 39.66,32.54 40.44,32.54 40.56,32.42 40.56,31.99 40.41,31.84 39.24,31.84 39.09,31.99 39.09,32.39 38.94,32.54 38.71,32.54 38.56,32.39 38.56,31.99 38.41,31.84 38.13,31.84 37.98,31.69 37.98,31.13 38.13,30.98 38.69,30.98 38.84,30.83 38.84,30.6 38.69,30.45 38.13,30.45 37.98,30.3 37.98,30.07 38.13,29.92 38.69,29.92 38.84,29.77 38.84,29.54 38.69,29.39 36.69,29.39 36.54,29.24 36.54,28.81 36.69,28.66 37.41,28.66 37.58,28.83 37.94,28.83 38.12,28.65 38.47,28.65 38.65,28.83 39.38,28.83 39.7,28.51 U9.15
FMC_A6: length 23.5
  TOP w0.15: U8.C4 v1(38.73,37.27)
  BOTTOM w0.102: 38.6,34.9 38.6,35.3 38.3,35.6 38.3,36.2 38,36.5 38,37 38.27,37.27 v1(38.73,37.27)
  BOTTOM w0.15: U9.50 28.25,35.8 28.97,35.08 28.97,31.26 30.62,29.61 35.91,29.61 37.35,31.05 37.35,32.05 38.6,33.3 38.6,34.9
FMC_A7: length 25.1
  TOP w0.102: U8.D4 38,37.3 v1(38,35.1)
  BOTTOM w0.15: U9.53 28.8,37.3 29.89,36.21 29.89,33.51 30.22,33.18 30.22,32.97 29.84,32.59 29.84,32.38 30,32.22 30.21,32.22 30.59,32.6 30.8,32.6 30.97,32.43 30.97,32.22 30.59,31.84 30.59,31.63 30.75,31.47 30.97,31.47 31.34,31.84 31.56,31.84 31.72,31.68 31.72,31.47 31.34,31.09 31.34,30.88 31.5,30.72 31.72,30.72 32.09,31.09 32.31,31.09 33,30.4 35.6,30.4 36.7,31.5 36.7,32.3 38,33.6 v1(38,35.1)
FMC_A8: length 24.1
  TOP w0.102: U8.H2 34.4,39.15 33.9,39.65
  TOP w0.15: 33.9,39.65 33.46,40.09 33.46,41.65 32.94,42.17 29.94,42.17 29.63,42.48 29.63,43.4 29.2,43.83 28.92,43.83 28.77,43.68 28.77,42.52 28.62,42.37 28.39,42.37 28.24,42.52 28.24,43.68 28.09,43.83 27.67,43.83 27.14,43.3 27.14,40.32 27.8,39.66 27.8,39.45 27.15,38.8 27.15,38.59 27.31,38.43 27.53,38.43 28.17,39.07 28.39,39.07 28.84,38.62 28.84,38.04 28.6,37.8 v1(28.28,37.8)
  BOTTOM w0.15: U9.54 v1(28.28,37.8)
FMC_A9: length 24.9
  TOP w0.102: 33.9,38.88 34.17,38.88 34.65,38.4 U8.H3
  TOP w0.15: 33.9,38.88 33.47,38.88 32.81,39.54 32.81,40.22 32.66,40.37 32.24,40.37 32.09,40.22 32.09,39.33 31.94,39.18 31.71,39.18 31.56,39.33 31.56,40.22 31.41,40.37 30.74,40.37 30.59,40.52 30.59,40.75 30.74,40.9 32.66,40.9 32.81,41.05 32.81,41.51 32.66,41.66 29.89,41.66 29.74,41.51 29.74,40.96 29.59,40.81 29.35,40.81 29.2,40.96 29.2,41.51 29.05,41.66 28.24,41.66 28.09,41.51 28.09,40.36 28.3,40.15 30,40.15 30.26,39.89 30.26,39.16 v1(29.4,38.3)
  BOTTOM w0.15: U9.55 v1(29.4,38.3)
FMC_A10: length 25.1
  TOP w0.102: 33.9,37.65 U8.H4
  TOP w0.15: 33.9,37.65 32.74,37.65 32.01,36.92 32.01,35.18 31.43,34.6 31.13,34.6 30.98,34.75 30.98,35.69 30.83,35.84 30.6,35.84 30.45,35.69 30.45,34.75 30.3,34.6 30.07,34.6 29.92,34.75 29.92,35.69 29.77,35.84 29.54,35.84 29.39,35.69 29.39,34.75 29.24,34.6 28.86,34.6 28.44,35.02 28.44,36.29 30.58,38.43 31.55,38.43 31.82,38.16 31.82,37.84 31.64,37.66 v1(30.7,37.66)
  BOTTOM w0.15: U9.56 29.8,38.8 30,38.6 30,37.9 30.24,37.66 v1(30.7,37.66)
FMC_A11: length 24.1
  TOP w0.102: 33.9,36.9 U8.H5
  TOP w0.15: 33.9,36.9 33.24,36.9 33,36.66 33,34.82 32.19,34.01 31.91,34.01 31.76,33.86 31.76,33.19 31.61,33.04 31.38,33.04 31.23,33.19 31.23,33.86 31.08,34.01 30.85,34.01 30.7,33.86 30.7,33.19 30.55,33.04 30.32,33.04 30.17,33.19 30.17,33.86 30.02,34.01 29.79,34.01 29.64,33.86 29.64,33.19 29.49,33.04 29.26,33.04 29.11,33.19 29.11,33.86 28.96,34.01 28.14,34.01 27.63,34.52 27.63,35.11 27.48,35.26 27.08,35.26 26.93,35.41 26.93,35.64 27.08,35.79 27.48,35.79 27.63,35.94 27.63,36.17 27.48,36.32 27.08,36.32 26.93,36.47 26.93,36.7 27.08,36.85 27.48,36.85 27.63,37 27.63,37.3 27.45,37.48 26.43,37.48 26.1,37.81 26.1,39.08 v1(26.32,39.3)
  BOTTOM w0.15: U9.57 v1(26.32,39.3)
FMC_A12: length 23.4
  TOP w0.15: U8.G3 v1(35.74,38.04)
  BOTTOM w0.102: 35.54,38.04 34.76,38.04 34.4,38.4 34.4,40.7 34.8,41.1
  BOTTOM w0.15: U9.87 36.2,47.07 35.56,46.43 31.92,46.43 31.77,46.58 31.77,47.22 31.62,47.37 31.39,47.37 31.24,47.22 31.24,46.58 31.09,46.43 30.44,46.43 30.29,46.28 30.29,45.65 30.47,45.47 33.39,45.47 34.36,44.5 34.36,43.78 35.3,42.84 35.3,41.6 34.8,41.1 ; v1(35.74,38.04) 35.54,38.04
FMC_A13: length 24.1
  TOP w0.15: U8.G4 v1(36.49,38.04)
  BOTTOM w0.102: v1(36.49,38.04) 36.1,38.44 36.1,41.1
  BOTTOM w0.15: U9.88 36.7,46.53 36.04,45.87 34.55,45.87 34.41,45.73 34.41,45.51 34.58,45.34 37.67,45.34 37.82,45.19 37.82,44.96 37.67,44.81 36.25,44.81 36.1,44.66 36.1,44.43 36.25,44.28 37.67,44.28 37.82,44.13 37.82,43.9 37.67,43.75 36.25,43.75 36.1,43.6 36.1,43.37 36.25,43.22 37.67,43.22 37.82,43.07 37.82,42.84 37.67,42.69 36.25,42.69 36.1,42.54 36.1,41.1
FMC_A14: length 25
  TOP w0.15: U8.F3 v1(36.48,38.77)
  BOTTOM w0.102: v1(36.48,38.77) 36.72,39 36.72,40.32 37.5,41.1
  BOTTOM w0.15: U9.89 37.2,47.45 38.21,46.43 38.21,45.83 38.5,45.54 40.6,45.54 40.75,45.39 40.75,45.08 40.9,44.93 41.14,44.93 41.29,45.08 41.29,45.39 41.44,45.54 41.67,45.54 41.82,45.39 41.82,45.08 41.97,44.93 42.2,44.93 42.35,45.08 42.35,45.39 42.5,45.54 42.73,45.54 42.88,45.39 42.88,45.08 43.03,44.93 43.26,44.93 43.41,45.08 43.41,45.39 43.56,45.54 44.02,45.54 44.3,45.26 44.3,44.02 44.04,43.76 39.76,43.76 37.83,41.83 37.83,41.43 37.5,41.1
FMC_A15: length 25
  TOP w0.15: U8.F4 v1(37.2,38)
  BOTTOM w0.102: 38.5,40.78 37.2,39.48 v1(37.2,38)
  BOTTOM w0.15: U9.90 37.7,47.72 39.11,46.31 42.65,46.31 42.8,46.46 42.8,46.59 42.95,46.74 43.18,46.74 43.33,46.59 43.33,46.46 43.48,46.31 43.71,46.31 43.86,46.46 43.86,46.7 44.01,46.85 45,46.85 45.15,46.7 45.15,43.6 44.67,43.12 40.26,43.12 38.8,41.66 38.8,41.08 38.5,40.78
FMC_A16: length 22.4
  TOP w0.102: U8.E4 v1(37.25,37.3)
  VCC w0.102: v1(37.25,37.3) 36.37,37.3 36.12,37.55 36.12,38.9 35.86,39.16 33.9,39.16
  VCC w0.15: v1(32.7,47.7) 32.7,46.99 31.83,46.12 30.32,46.12 28.52,44.32 28.52,40.05 29.41,39.16 33.9,39.16
  BOTTOM w0.15: U9.80 v1(32.7,47.7)
FMC_A17: length 23.6
  TOP w0.15: U8.D3 v1(38.67,38.72)
  VCC w0.102: v1(38.67,38.72) 38.25,38.3 37.7,38.3 36.45,39.55 34.11,39.55
  VCC w0.15: v1(33.2,47.4) 33.2,46.3 32.23,45.33 30.55,45.33 29.52,44.3 29.52,42.7 29.86,42.36 30.73,42.36 30.88,42.21 30.88,42 30.7,41.82 29.81,41.82 29.52,41.53 29.52,40.45 30.42,39.55 34.11,39.55
  BOTTOM w0.15: U9.81 v1(33.2,47.4)
FMC_A18: length 25
  TOP w0.102: 35.1,41.1 35.1,40.15 U8.H1
  TOP w0.15: 35.1,41.1 35.2,41.2 35.2,42.6 34.71,43.09 32.99,43.09 32.65,43.43 32.65,44.21 32.3,44.56 27.49,44.56 27.34,44.71 27.34,45.21 27.49,45.36 29.71,45.36 29.86,45.51 29.86,45.98 30.01,46.13 30.25,46.13 30.4,45.98 30.4,45.51 30.55,45.36 30.78,45.36 30.93,45.51 30.93,45.98 31.08,46.13 31.31,46.13 31.46,45.98 31.46,45.51 31.61,45.36 32.6,45.36 32.9,45.66 32.9,46.06 33.14,46.3 34.1,46.3 34.25,46.45 34.25,47.17 v1(33.7,47.72)
  BOTTOM w0.15: U9.82 v1(33.7,47.72)
